# Altium PCB 分电板V2.PcbDoc (part 1 of 2)
Units mil, origin at the board's own origin, x right, y up, seen from the top; angles counter-clockwise.
Board outline 3149.61 x 2362.21 mil, 4 copper layers (Top Layer, GND, POWER, Bottom Layer), stack 23.756 mil thick; 196 components, 158 nets, 590 pads, 320 vias.
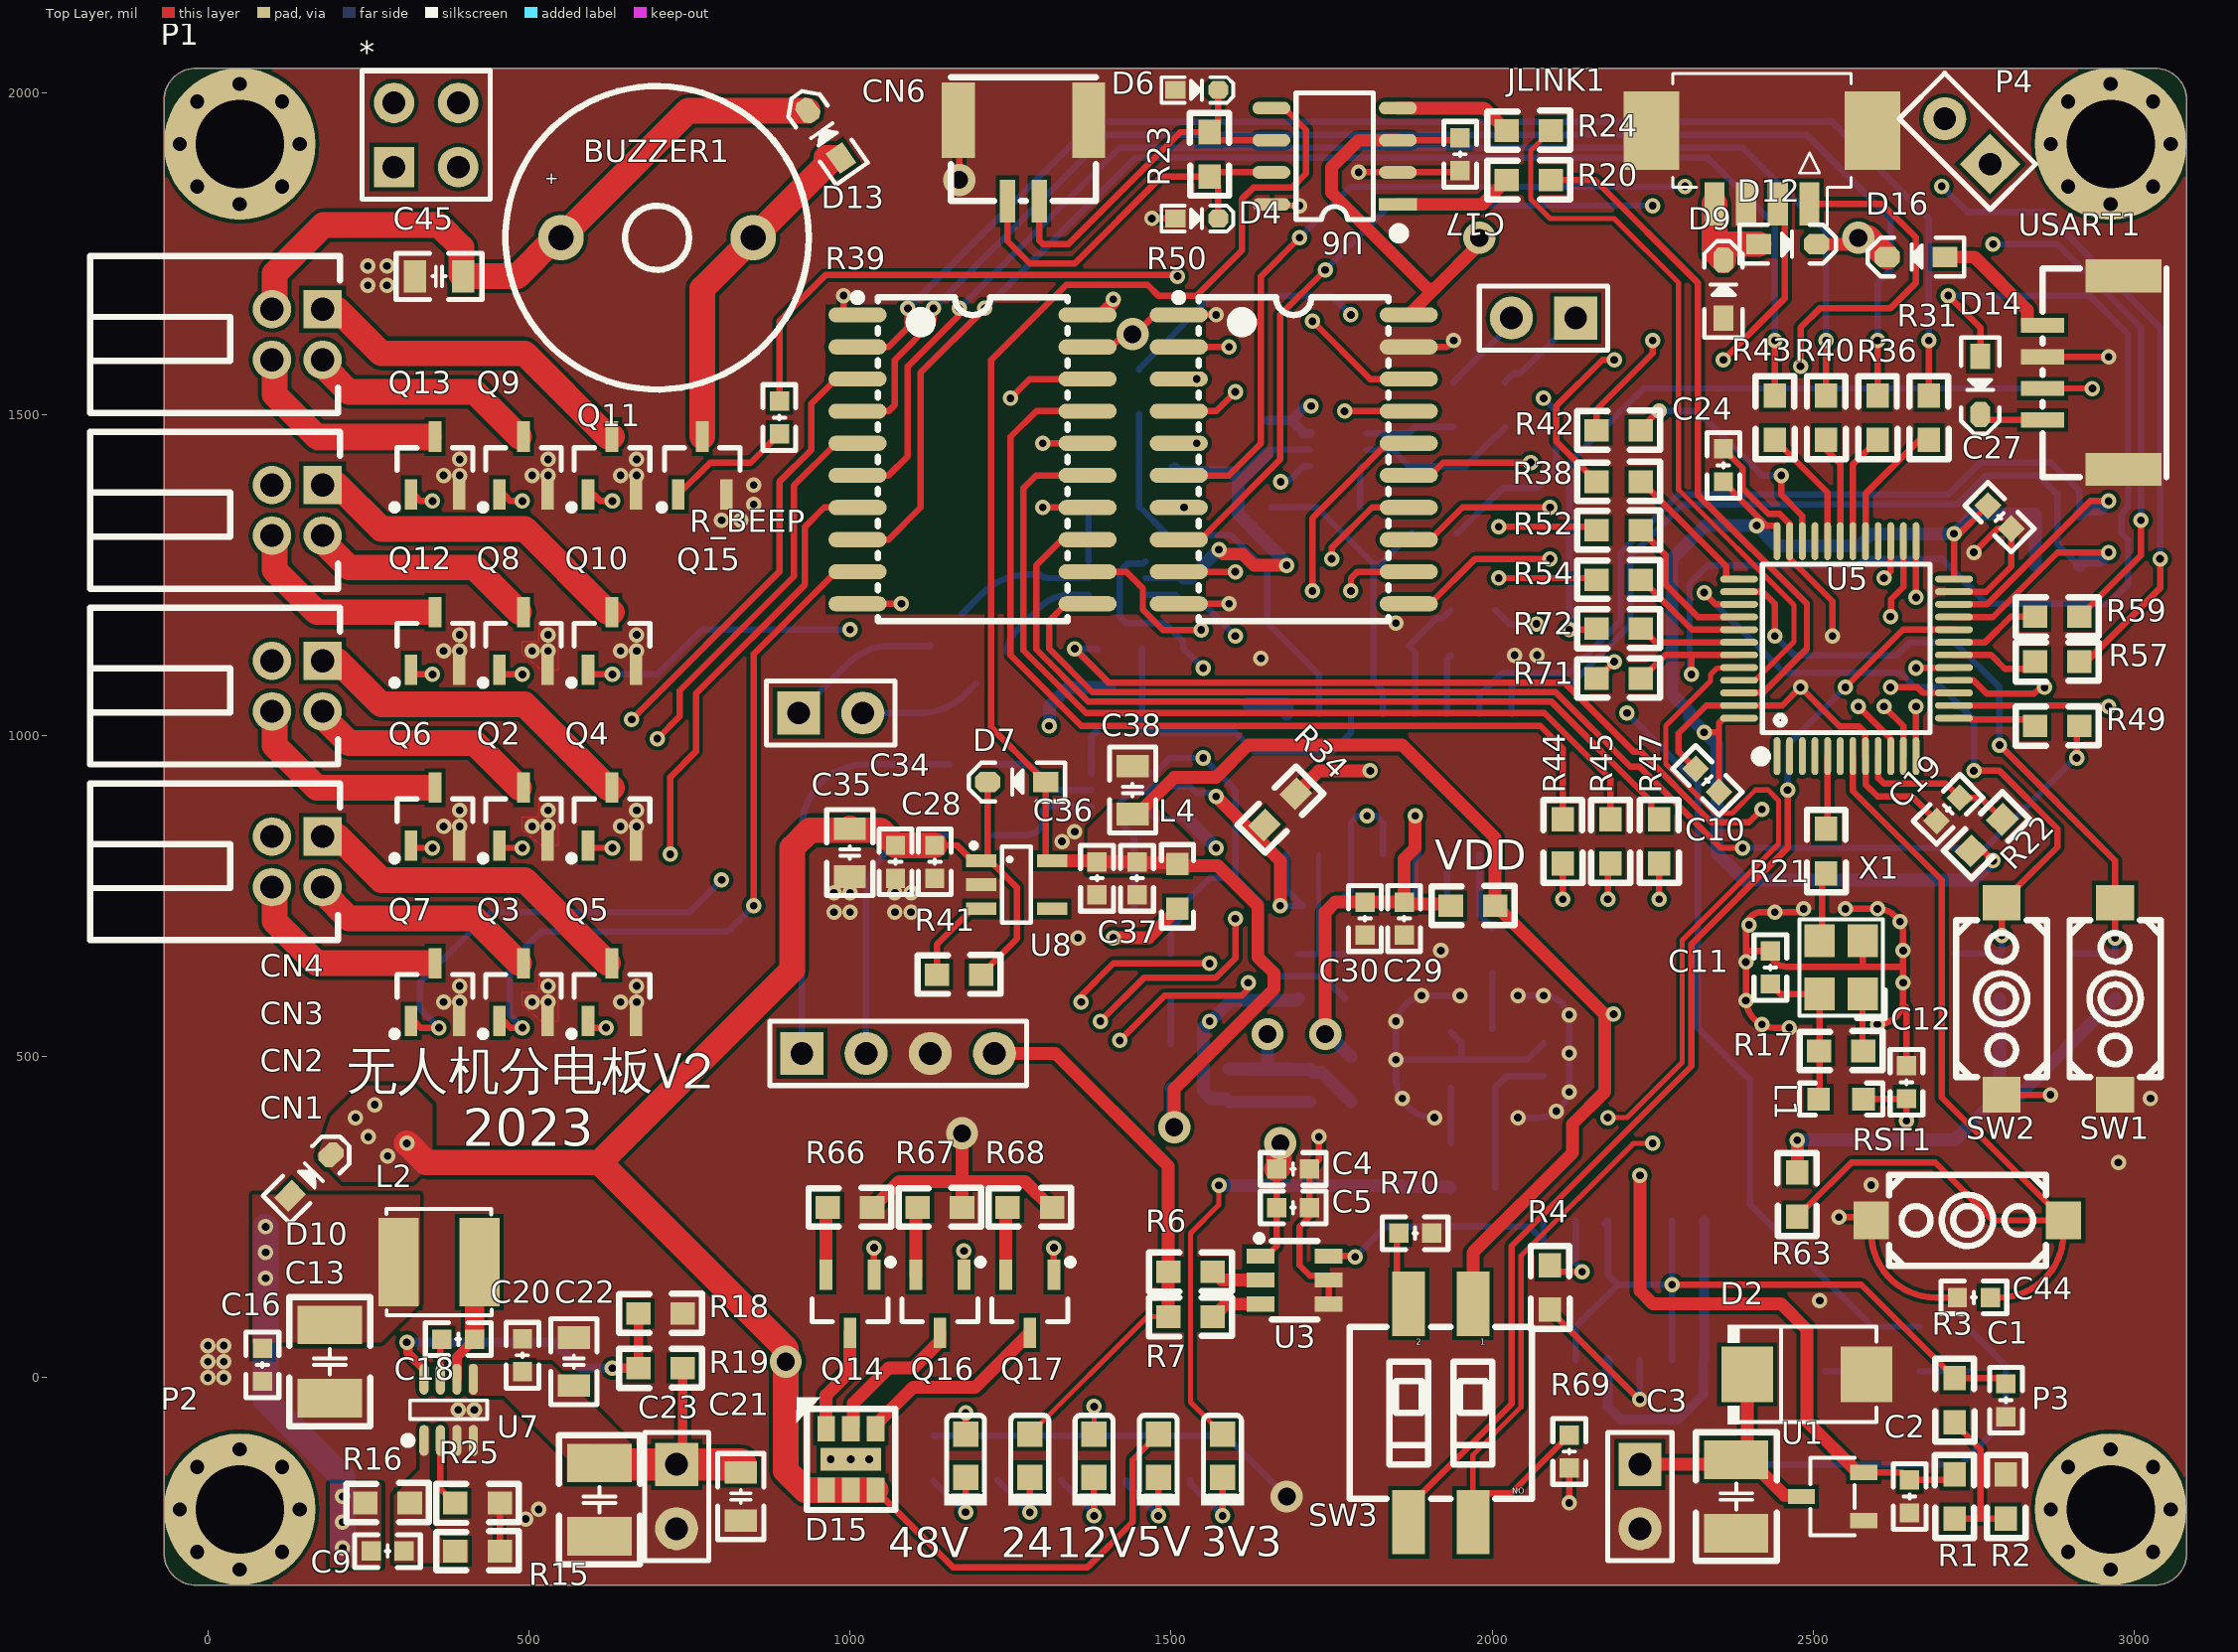
[diagram p0: Top Layer view]
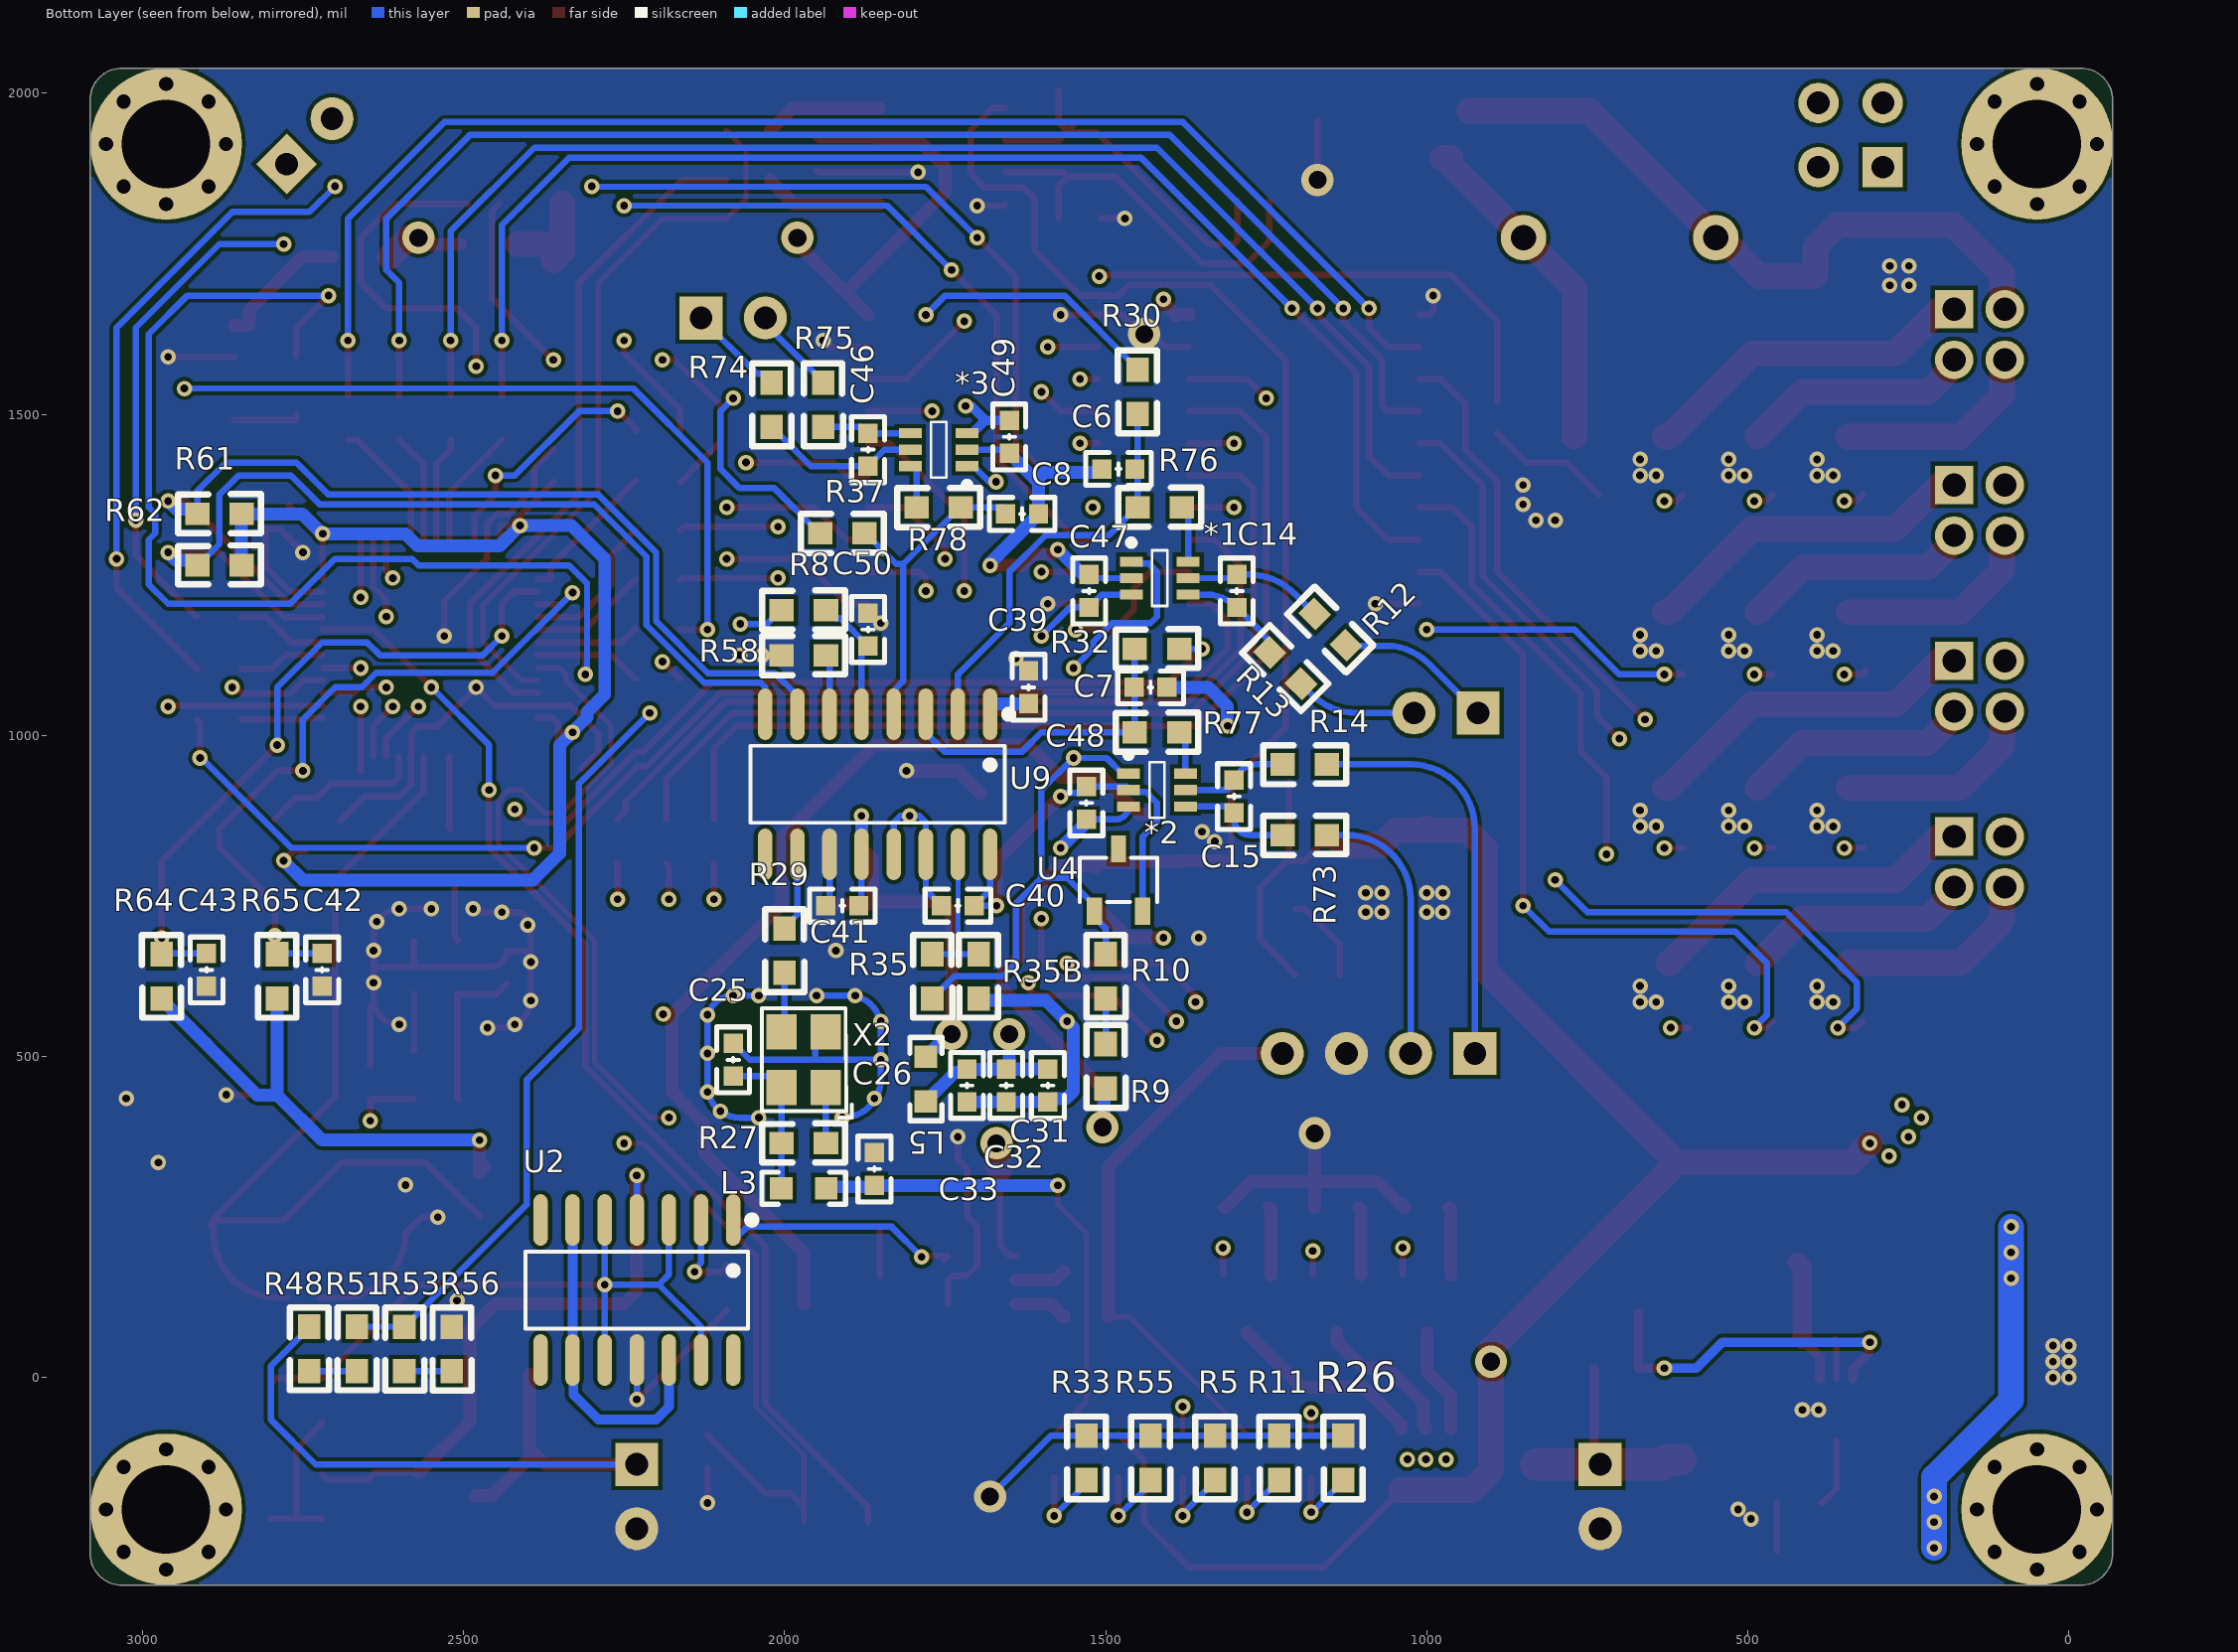
[diagram p1: Bottom Layer view, seen from below]
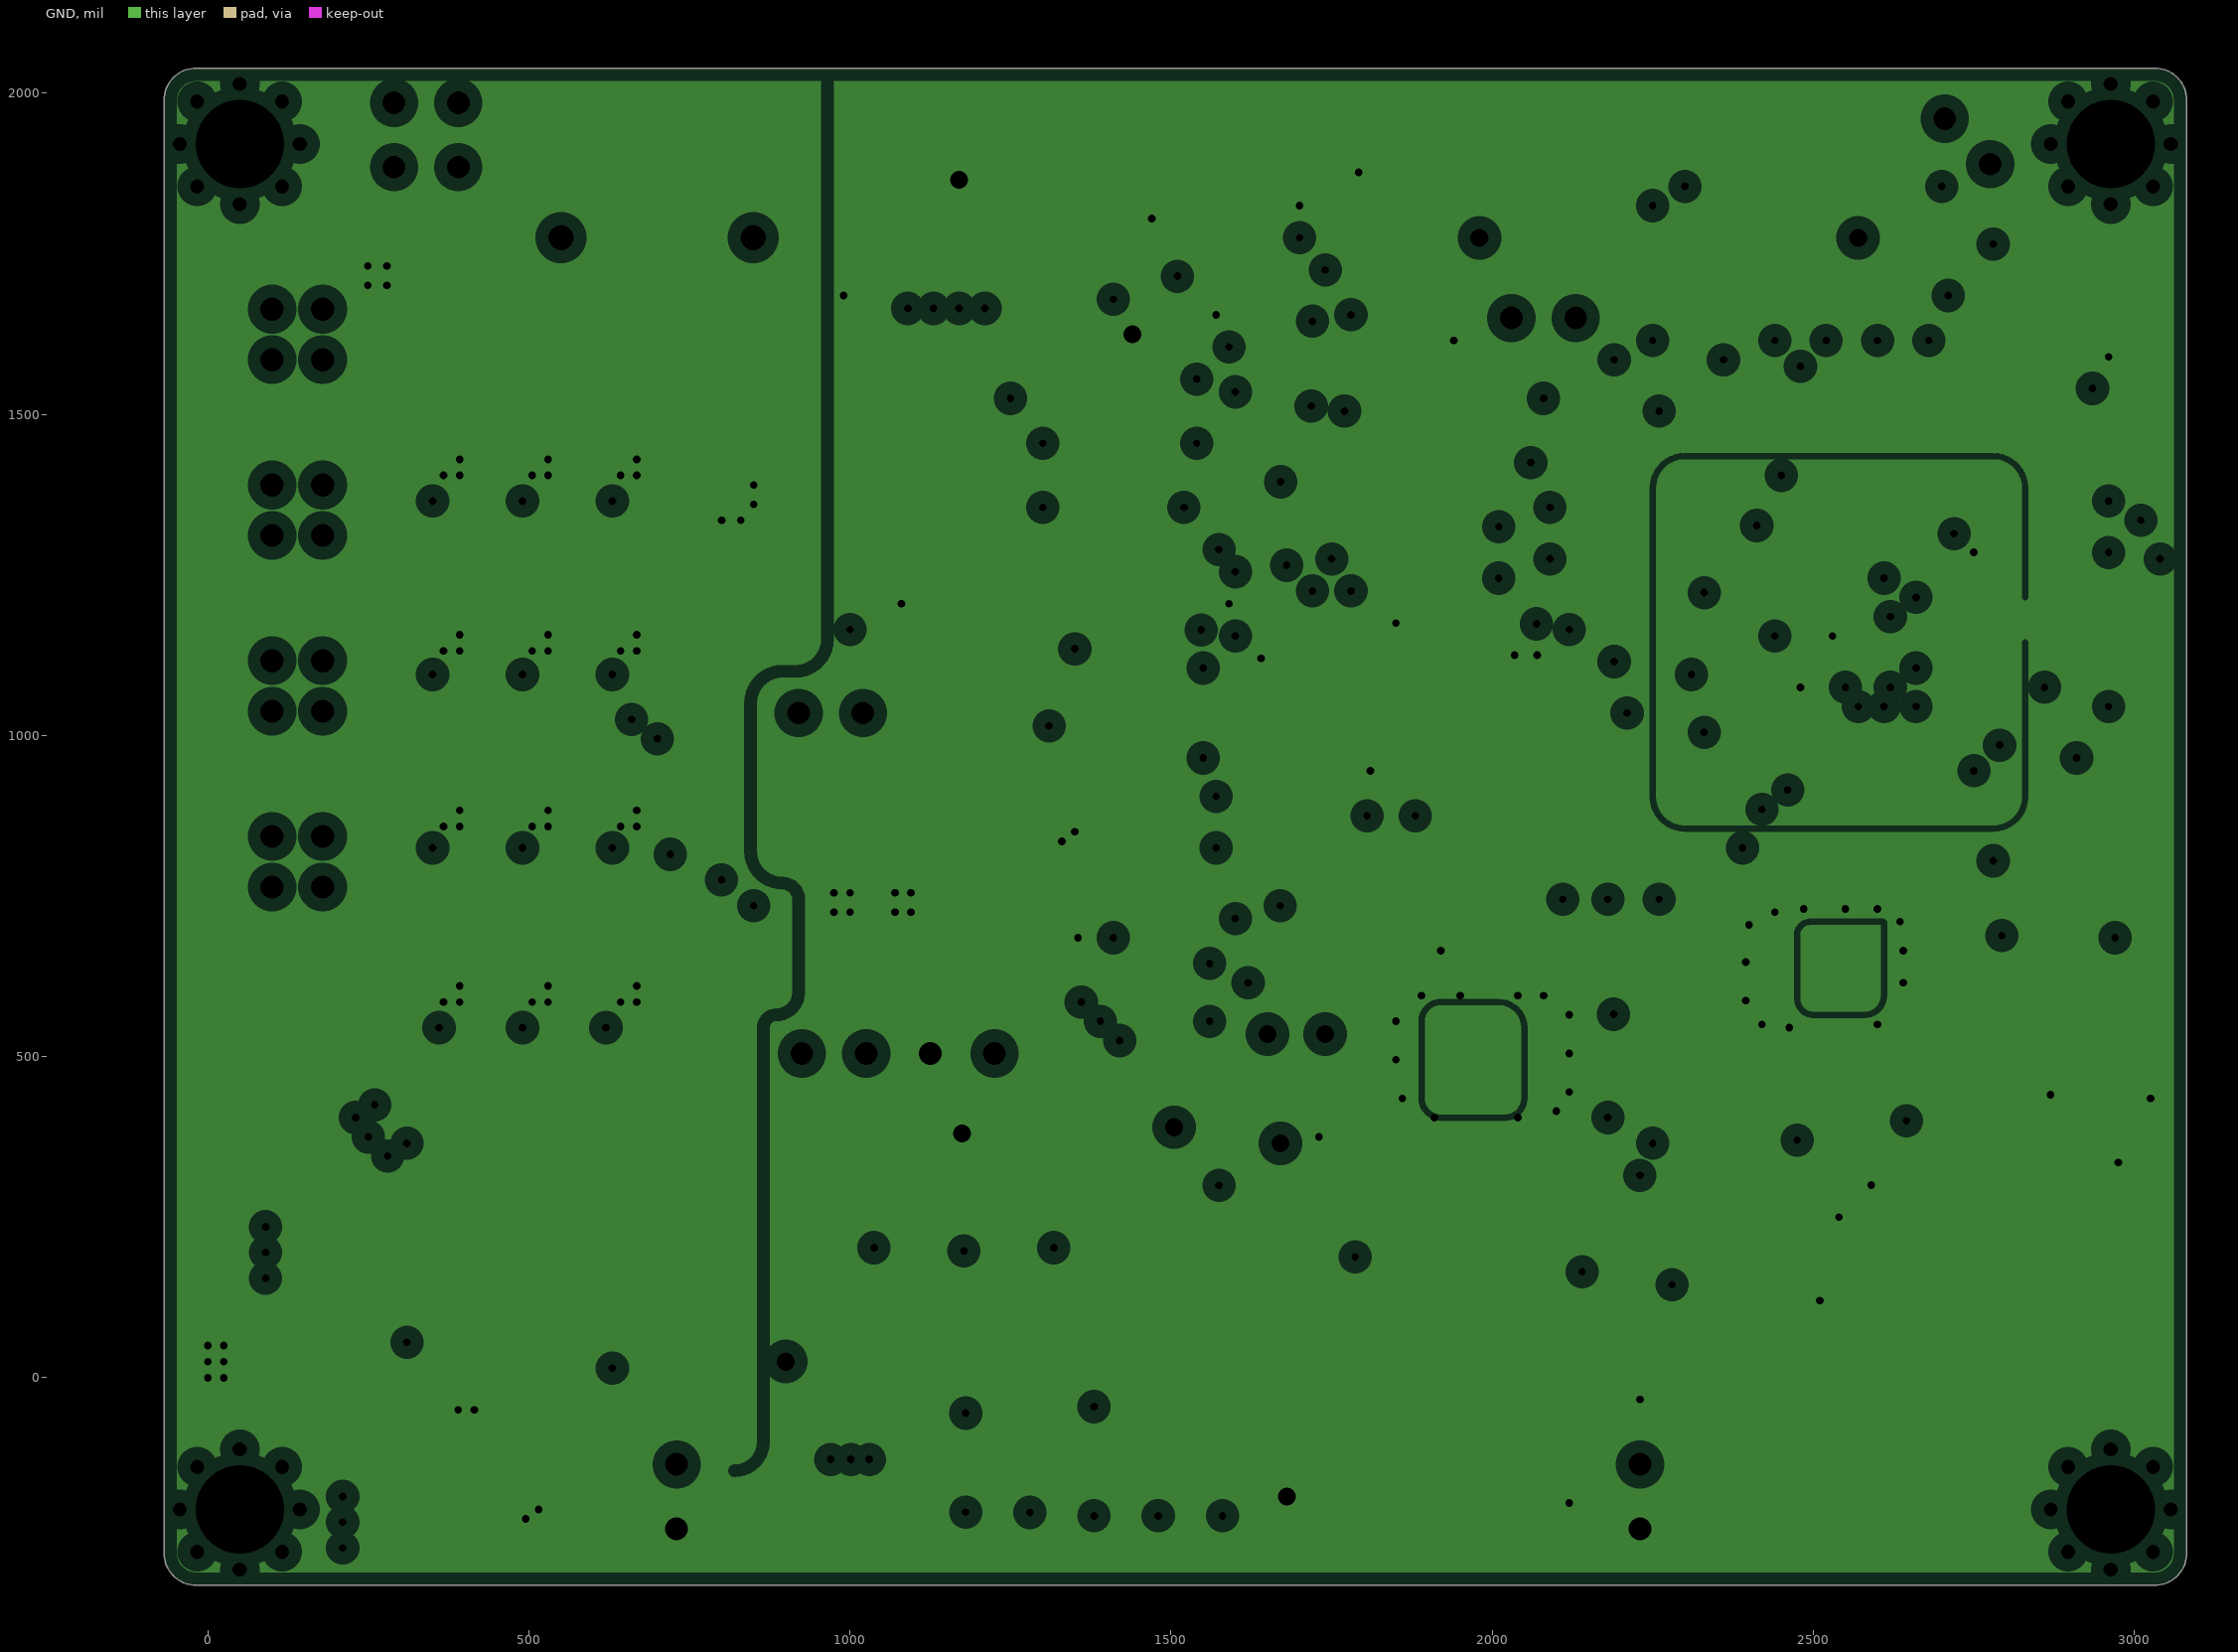
[diagram p2: GND, clearances drawn from the general rule]
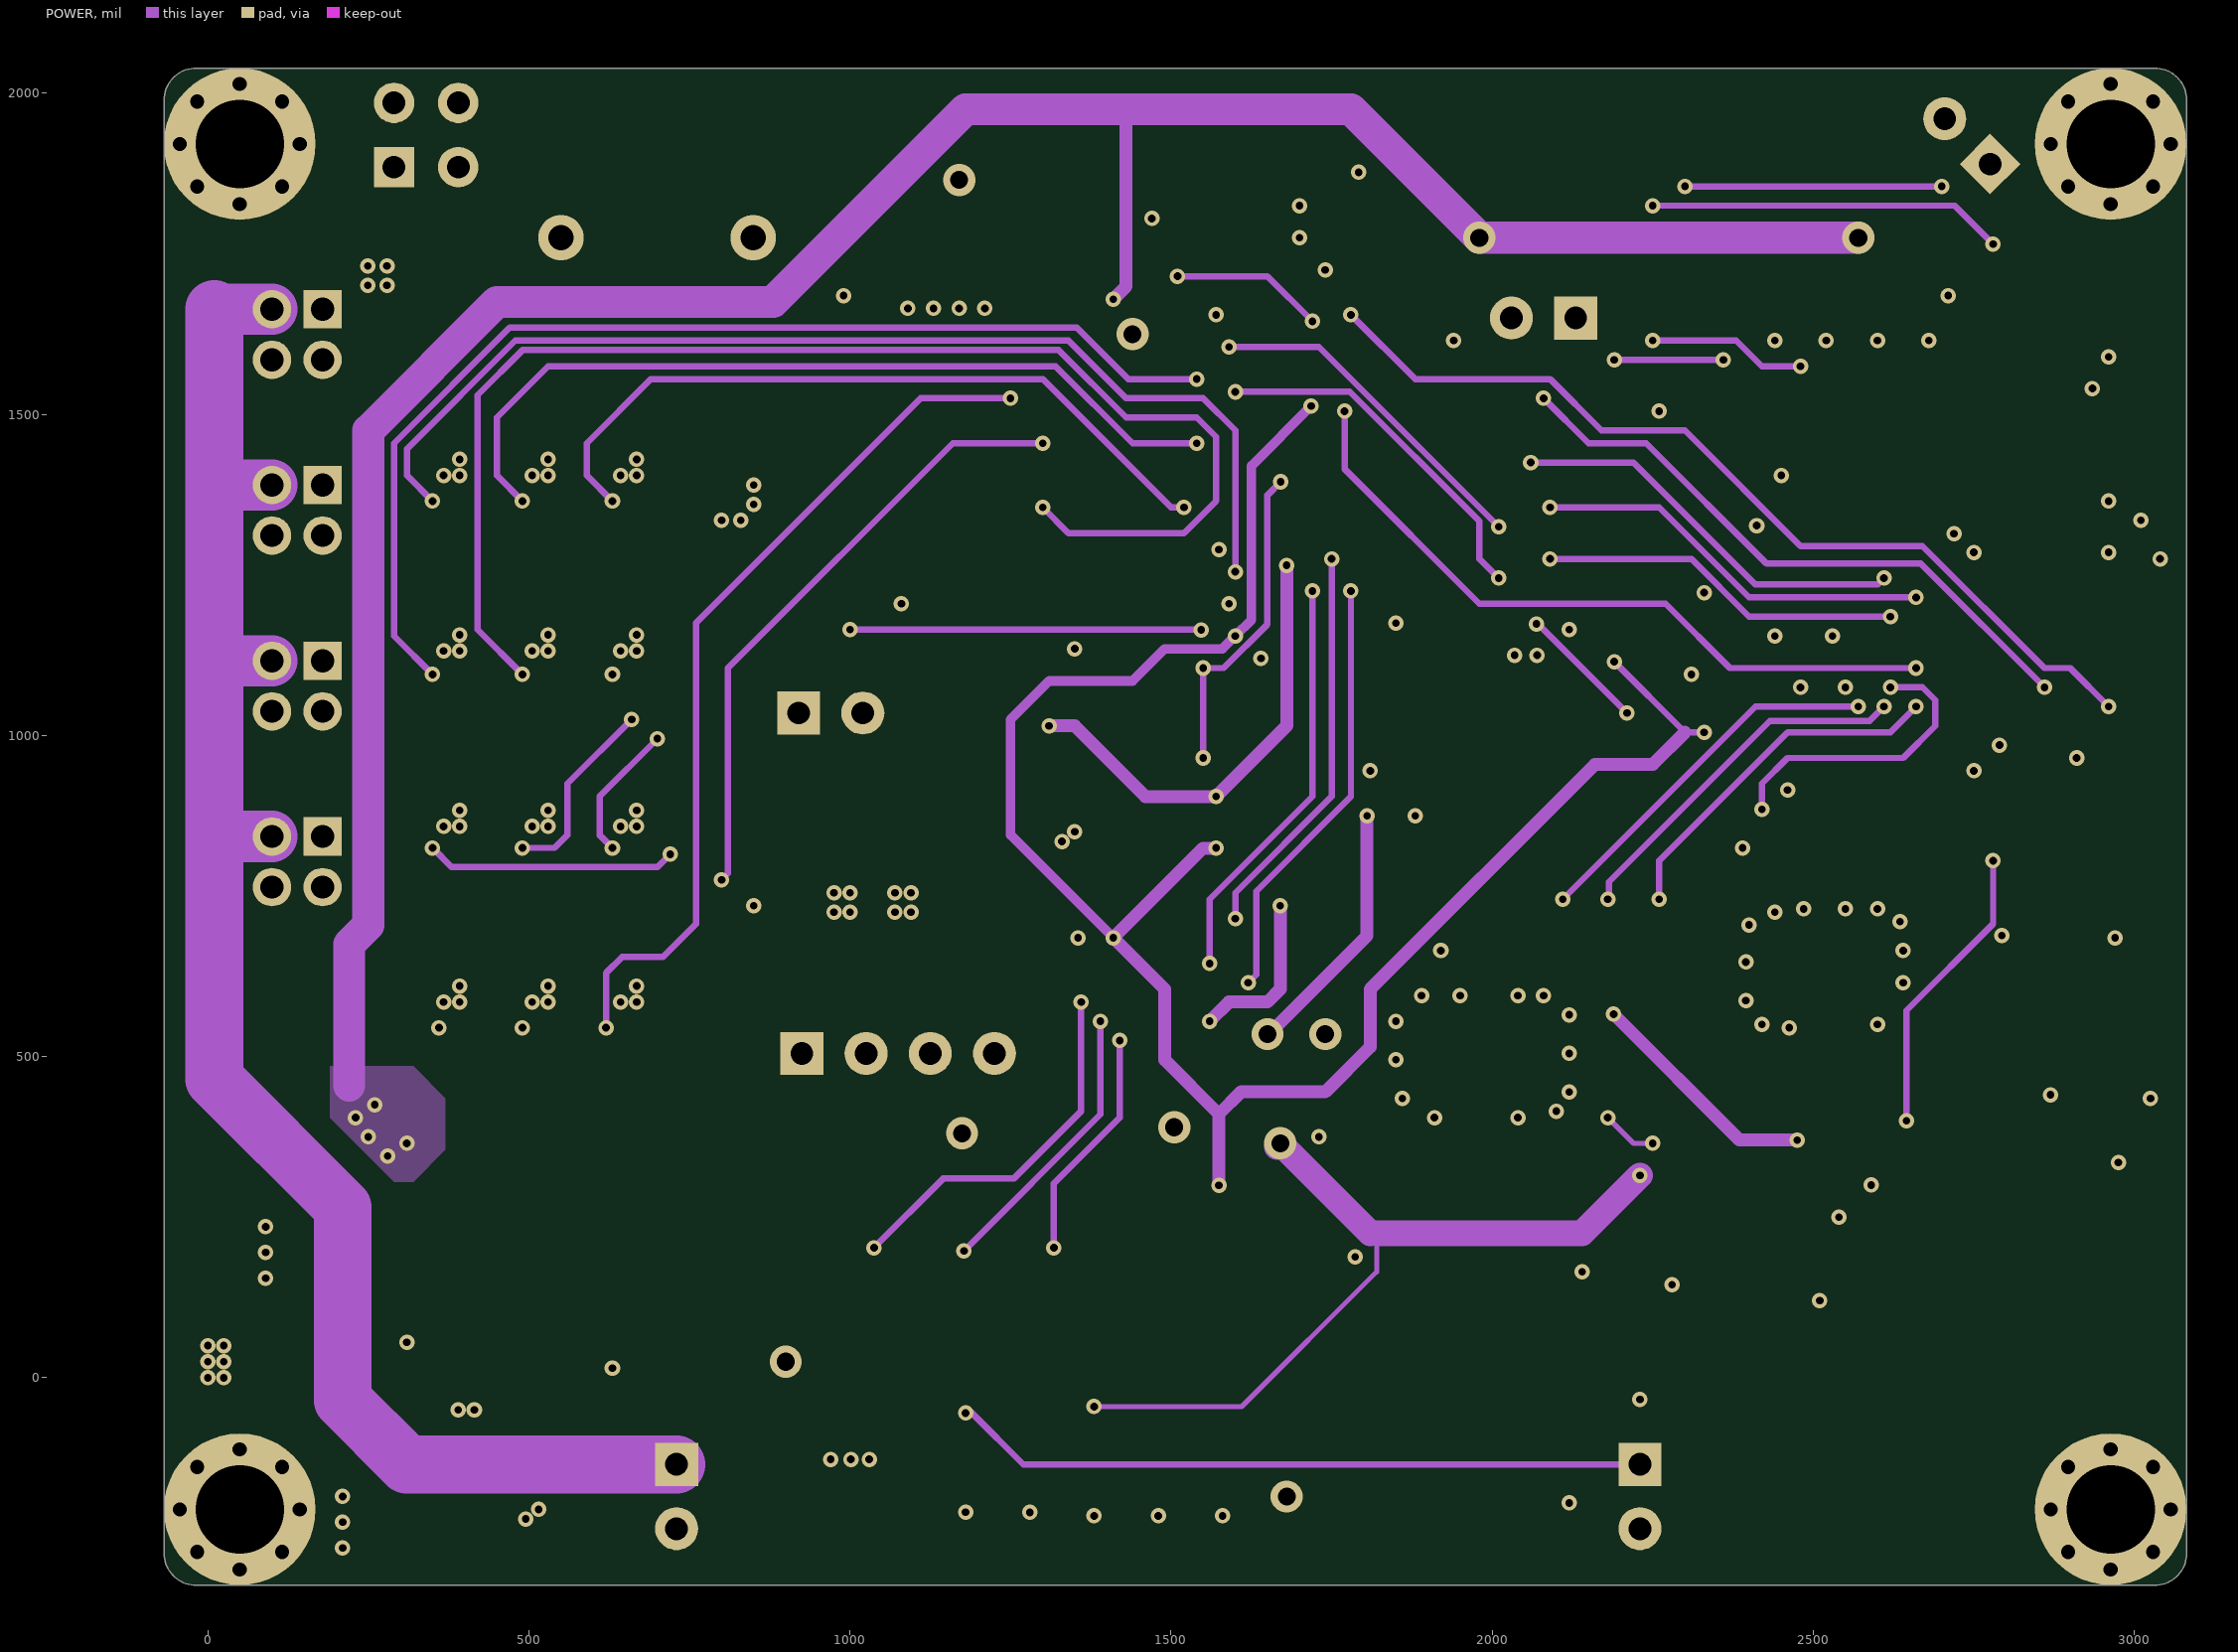
[diagram p3: POWER]

## Layer stack, top to bottom
Top Solder: solder mask 0.4, Solder Resist, Dk 3.5
Top Layer: signal copper 1.4
Dielectric 2: prepreg 2.8, PP-006, Dk 4.1
GND: plane copper 1.3778, net GND
Dielectric 1: dielectric 12.6, FR-4, Dk 4.8
POWER: signal copper 1.3778
Dielectric 3: prepreg 2.8, PP-006, Dk 4.1
Bottom Layer: signal copper 1.4
Bottom Solder: solder mask 0.4, Solder Resist, Dk 3.5

## Board outline
-68.11,-273.11 -68.11,1989.09 cw(c-18.11,1989.09) -18.11,2039.09 3031.5,2039.09 cw(c3031.5,1989.09) 3081.5,1989.09 3081.5,-273.11 cw(c3031.5,-273.11) 3031.5,-323.11 -18.11,-323.11 cw(c-18.11,-273.11)

## Design rules (kind name [scope] priority, off if disabled: settings)
Clearance [All] p1: gap=5.5 ignorepadtopadclearanceinfootprint=TRUE except(5: Arc-Arc Arc-Track Track-Track; 6: SMDPad-SMDPad SMDPad-THPad SMDPad-Via SMDPad-Fill SMDPad-Poly SMDPad-Region SMDPad-Text SMDPad-Hole THPad-THPad THPad-Via THPad-Fill THPad-Poly THPad-Region THPad-Text THPad-Hole Via-Via Via-Fill Via-Poly Via-Region Via-Text Via-Hole Fill-Hole Poly-Hole Region-Hole Text-Hole)
ComponentClearance [All] p1: gap=1 collisioncheckmode=3 verticalgap=1 showdistances=TRUE
DiffPairsRouting [All] p1: maxlimit=12 minlimit=8 mostfreqgap=10 toplayer_minwidth=8 toplayer_maxwidth=15 toplayer_prefwidth=10 midlayer1_minwidth=8 midlayer1_maxwidth=15 midlayer1_prefwidth=10 bottomlayer_minwidth=8 bottomlayer_maxwidth=15 bottomlayer_prefwidth=10 maxuncoupledlength=500
HoleSize [All] p1: absolutevalues=TRUE maxlimit=1574.8 minlimit=11.81 maxpercent=80.000 minpercent=20.000
HoleToHoleClearance [All] p1: gap=8 allowstackedmicrovias=TRUE
MinimumSolderMaskSliver [All] p1: minsoldermaskwidth=0
NetAntennae [All] p1: netantennaetolerance=1
PasteMaskExpansion [All] p1: expansion=5
PlaneClearance [All] p1: clearance=20
PlaneConnect [All] p1: pad.planeconnectstyle=Relief pad.reliefexpansion=20 pad.reliefentries=4 pad.reliefconductorwidth=25 pad.reliefairgap=10 via.planeconnectstyle=Direct via.reliefexpansion=20 via.reliefentries=4 via.reliefconductorwidth=10 via.reliefairgap=10
PolygonConnect [All] p1: connectstyle=Direct reliefconductorwidth=25 reliefentries=4 polygonreliefangle="90 Angle" airgapwidth=10
RoutingVias [All] p1: holewidth=20 width=35 viastyle="Through Hole" minholewidth=11.81 minwidth=23.62 maxholewidth=1574.8 maxwidth=1580.8
SilkToSilkClearance [All] p1: silktosilkclearance=0
SilkToSolderMaskClearance [IsPad] p1: minsilkscreentomaskgap=0 clearancetoexposedcopper=TRUE
SolderMaskExpansion [All] p1: expansion=5
Width [All] p1: maxlimit=125 minlimit=5 preferedwidth=20
19 further rules are at their usual default settings.

## Components (designator, comment, footprint, x,y, rotation, side; value= is the part's Value field where it differs from the comment)
3V3 "LED/绿" LED_0603 1580,-121.53 r90 top
5V "LED/蓝" LED_0603 1480,-121.53 r90 top
12V "LED" LED_0603 1380,-121.54 r90 top
24 "LED" LED_0603 1280,-121.53 r90 top (schematic designator 24_ON)
48V "LED/蓝" LED_0603 1180,-121.54 r90 top
* "上中板连接器" 上中板连接器 730,-235 r0 top locked
*1 "LT199" SC70-6L 1415.71,1245 r180 bottom
*2 "LT199" SC70-6L 1420,915 r180 bottom
*3 "LT199" SC70-6L 1760,1445 r0 bottom
BUZZER1 "TMB12A12" BUZ-TH_BD12.0-P7.60-D0.6-FD 699.6,1775 r0 top value=2400Hz
C1 "10nF" "C 0603_L" 2800,-35 r90 top
C2 "10uF" "C 0603_L" 2650,-185 r90 top
C3 "CAP" "C 1210_L" 2380,-185 r270 top
C4 "1uF" "C 0603_L" 1690,325 r180 top
C5 "100nF" "C 0603_L" 1690,265 r180 top
C6 "1uf" "C 0603_L" 1480,1415 r0 bottom
C7 "1uf" "C 0603_L" 1430,1075 r180 bottom
C8 "1uf" "C 0603_L" 1630,1345 r180 bottom
C9 "22pF/50V/0603" "C 0603_L" 280,-270 r0 top
C10 "100nf" "C 0603_L" 2335,930 r135 top
C11 "100nF" "C 0603_L" 2433.17,638.75 r270 top
C12 "1uF" "C 0603_L" 2645,460 r270 top
C13 "47uF/50V/1210" "C 1210_L" 190,25 r270 top
C14 "100nf" "C 0603_L" 1295.71,1225 r90 bottom
C15 "100nf" "C 0603_L" 1300,905 r90 bottom
C16 "100nF/50V/0603" "C 0603_L" 85,20 r270 top
C17 "100nF/50V/0603" "C 0603_L" 1950,1905 r90 top
C18 "10nF/50V/0603" "C 0603_L" 390,60 r180 top
C19 "100nf" "C 0603_L" 2710,885 r225 top
C20 "100nF/50V/0603" "C 0603_L" 490,35 r90 top
C21 "1uF/50V/0805" "C 0805_L" 830,-185 r270 top
C22 "4.7uF/50V/0805" "C 0805_L" 570,25 r90 top
C23 "47uF/50V/1210" "C 1210_L" 610,-190 r270 top
C24 "100nf" "C 0603_L" 2360,1420.59 r270 top
C25 "100nF" "C 0603_L" 2080,495 r270 bottom
C26 "1uF" "C 0603_L" 1860,325 r270 bottom
C27 "100nf" "C 0603_L" 2790,1340 r135 top
C28 "100nF/50V/0603" "C 0603_L" 1132.01,803.31 r270 top
C29 "100nF/50V/0603" "C 0603_L" 1862.95,715 r270 top
C30 "100nF/50V/0603" "C 0603_L" 1801.77,715 r270 top
C31 "1uF/50V/0603" "C 0603_L" 1590,455 r270 bottom
C32 "100nF/50V/0603" "C 0603_L" 1654.69,455 r270 bottom
C33 "10nF/50V/0603" "C 0603_L" 1715.87,455 r270 bottom
C34 "2.2uF/25V/0603" "C 0603_L" 1070.83,803.31 r270 top
C35 "4.7uF/25V/0805" "C 0805_L" 999.6,817.65 r270 top
C36 "100nF/12V/0402" "C 0603_L" 1384.6,777.65 r270 top
C37 "2.2uF/25V/0603" "C 0603_L" 1446.89,777.65 r270 top
C38 "4.7uF/25V/0805" "C 0805_L" 1440,915 r90 top
C39 "1uF" "C 0603_L" 1620,1075 r270 bottom
C40 "0.1uF" "C 0603_L" 1730,735 r0 bottom
C41 "0.1uF" "C 0603_L" 1910,735 r0 bottom
C42 "100nF" "C 0603_L" 2720,635 r270 bottom
C43 "100nF" "C 0603_L" 2900,635 r270 bottom
C44 "100nF" "C 0603_L" 2750,125 r180 top
C45 "10uf" "C 0805_L" 360,1715 r180 top
C46 "100nf" "C 0603_L" 1870,1445 r270 bottom
C47 "100nF" "C 0603_L" 1525.71,1225 r270 bottom
C48 "100nF" "C 0603_L" 1530,895 r270 bottom
C49 "100nF" "C 0603_L" 1650,1465 r90 bottom
C50 "1uf" "C 0603_L" 1870,1165 r90 bottom
CN1 "A2006WR-2x2P" CONN-TH_A2006WR-2X2P 139.37,803.31 r270 top
CN2 "A2006WR-2x2P" CONN-TH_A2006WR-2X2P 139.37,1076.99 r270 top
CN3 "A2006WR-2x2P" CONN-TH_A2006WR-2X2P 139.37,1350.68 r270 top
CN4 "A2006WR-2x2P" CONN-TH_A2006WR-2X2P 139.37,1624.37 r270 top
CN6 "GH1.25-2P" GH1.25-2P-LT 1270,1895 r180 top
D2 "SMBJ70A_C114008" SMB_L4.6-W3.6-LS5.3-RD 2490,5 r0 top
D4 "ESD5Z5VL" SOD-523 1540,1805 r0 top
D6 "ESD5Z5VL" SOD-523 1540,2005 r0 top
D7 "SD103AWS" SOD-323 1259.6,927.65 r180 top
D9 "BZX52B5V6" SOD-323 2360,1695 r90 top
D10 "SD103AWS" SOD-323 160,315 r45 top
D12 "SD103AWS" SOD-323 2460,1765 r0 top
D13 "SD103AWS" SOD-323 960,1936 r125 top
D14 "SD103AWS" SOD-323 2760,1545 r270 top
D15 "RGB3030" LED-SMD_L3.0-W3.0_C9900015600 987.28,-159.75 r180 top
D16 "SD103AWS" SOD-323 2660,1745 r180 top
JLINK1 "MX1.25_4p" MX1.25_4PIN 2420,1885 r0 top
L1 "磁珠470Ω/100MHz" "L 0603" 2543.17,433.75 r0 top
L2 "33uF/0.9A" IND-SMD_L4.0-W4.0 360,180 r180 top
L3 "磁珠470Ω/100MHz" "L 0603" 1970,295 r180 bottom
L4 "磁珠470Ω/100MHz" "L 0603" 1510,765 r90 top
L5 "磁珠470Ω/100MHz" "L 0603" 1780,465 r270 bottom
P1 "固定孔" 固定孔 49.69,1920.99 r0 top
P2 "固定孔" 固定孔 49.69,-204.99 r0 top
P3 "固定孔" 固定孔 2963.08,-204.99 r0 top
P4 "固定孔" 固定孔 2963.08,1920.99 r0 top
Q2 "5N10-MS" SOT23-3N 491.61,873.71 r0 top
Q3 "5N10-MS" SOT23-3N 491.61,600.38 r0 top
Q4 "5N10-MS" SOT23-3N 629.38,873.71 r0 top
Q5 "5N10-MS" SOT23-3N 629.38,600.38 r0 top
Q6 "5N10-MS" SOT23-3N 353.83,873.71 r0 top
Q7 "5N10-MS" SOT23-3N 353.83,600.38 r0 top
Q8 "5N10-MS" SOT23-3N 491.61,1147.04 r0 top
Q9 "5N10-MS" SOT23-3N 491.61,1420.38 r0 top
Q10 "5N10-MS" SOT23-3N 629.38,1147.04 r0 top
Q11 "5N10-MS" SOT23-3N 629.38,1420.38 r0 top
Q12 "5N10-MS" SOT23-3N 353.83,1147.04 r0 top
Q13 "5N10-MS" SOT23-3N 353.83,1420.38 r0 top
Q14 "5N10-MS" SOT23-3N 1000,115 r180 top
Q15 "5N10-MS" SOT23-3N 770,1420.38 r0 top
Q16 "5N10-MS" SOT23-3N 1140,115 r180 top
Q17 "5N10-MS" SOT23-3N 1280,115 r180 top
R1 "100K" "R 0603_L" 2720,-185 r270 top
R2 "10K" "R 0603_L" 2800,-185 r90 top
R3 "10K" "R 0603_L" 2720,-35 r90 top
R4 "10K" "R 0603_L" 2090,140.5 r90 top
R5 "47K" "R 0603_L" 1329.5,-125 r270 bottom
R6 "10" "R 0603_L" 1530,165 r0 top
R7 "10" "R 0603_L" 1530,95 r0 top
R8 "330" "R 0603_L" 1970,1195 r0 bottom
R9 "1k" "R 0603_L" 1500,485 r90 bottom
R10 "1k" "R 0603_L" 1500,625 r90 bottom
R11 "47K" "R 0603_L" 1229.75,-125 r270 bottom
R12 "100" "R 0603_L" 1150,1165 r225 bottom
R13 "100" "R 0603_L" 1220,1105 r225 bottom
R14 "100" "R 0603_L" 1190,955 r180 bottom
R15 "30k/0603" "R 0603_L" 420,-270 r180 top
R16 "220k/0603" "R 0603_L" 280,-195 r180 top
R17 "10k/0603" "R 0603_L" 2543.17,508.75 r180 top
R18 "30k/0603" "R 0603_L" 705,100 r180 top
R19 "100k/0603" "R 0603_L" 705,15 r0 top
R20 "330R/0603" "R 0603_L" 2057,1865 r180 top
R21 "10R" "R 0603_L" 2520,820 r90 top
R22 "0R" "R 0603_L" 2770,845 r45 top
R23 "120R/0603" "R 0603_L" 1560,1905 r270 top
R24 "330R/0603" "R 0603_L" 2057,1941.88 r180 top
R25 "47k/0603" "R 0603_L" 420,-195 r0 top
R26 "47K" "R 0603_L" 1130,-125 r270 bottom
R27 "10k/0603" "R 0603_L" 1970,365 r0 bottom
R29 "10R" "R 0603_L" 2000,665 r90 bottom
R30 "NAN" "R 0603_L" 1450,1535 r270 bottom
R31 "100R" "R 0603_L" 2680,1495 r90 top
R32 "NAN" "R 0603_L" 1420,1135 r0 bottom
R33 "2k/0603" "R 0603_L" 1530,-125 r90 bottom
R34 "0" "R 0603_L" 1670,885 r45 top
R35 "0" "R 0603_L" 1770,625 r90 bottom
R35B "NAN" "R 0603_L" 1697.75,625 r270 bottom
R36 "100R" "R 0603_L" 2600,1495 r90 top
R37 "NAN" "R 0603_L" 1910,1315 r180 bottom
R38 "100R/0603" "R 0603_L" 2197,1395 r180 top
R39 "AIP74HC244SA.TB" SOP-20_L12.7-W7.5-P1.27-LS10.2-BL 1190.87,1430.43 r270 top
R40 "100R" "R 0603_L" 2520,1495 r90 top
R41 "4.7k/0603" "R 0603_L" 1169.6,627.65 r180 top
R42 "100R/0603" "R 0603_L" 2197,1475 r180 top
R43 "100R" "R 0603_L" 2440,1495 r90 top
R44 "100R" "R 0603_L" 2110,835 r90 top
R45 "100R" "R 0603_L" 2184.07,835 r90 top
R47 "100R" "R 0603_L" 2260,835 r90 top
R48 "0" "R 0603_L" 2740,45 r90 bottom
R49 "100R" "R 0603_L" 2880,1015 r0 top
R50 "AIP74HC244SA.TB" SOP-20_L12.7-W7.5-P1.27-LS10.2-BL 1690.87,1430.43 r270 top
R51 "75K" "R 0603_L" 2666,45 r90 bottom
R52 "100R" "R 0603_L" 2197,1319.42 r180 top
R53 "4.7K" "R 0603_L" 2592,44.5 r90 bottom
R54 "100R" "R 0603_L" 2197,1242.54 r180 top
R55 "4.7k/0603" "R 0603_L" 1430.25,-125 r90 bottom
R56 "0" "R 0603_L" 2518,44.5 r90 bottom
R57 "100R" "R 0603_L" 2880,1115 r0 top
R58 "330R" "R 0603_L" 1970,1125 r180 bottom
R59 "100R" "R 0603_L" 2880,1185 r0 top
R61 "330R" "R 0603_L" 2880,1345 r0 bottom
R62 "330R" "R 0603_L" 2880,1265 r0 bottom
R63 "4.7k/0603" "R 0603_L" 2475,285 r270 top
R64 "10k" "R 0603_L" 2970,625 r270 bottom
R65 "10k" "R 0603_L" 2790,625 r270 bottom
R66 "3.3K" "R 0603_L" 1000,265 r180 top
R67 "3.3K" "R 0603_L" 1140,265 r180 top
R68 "3.3K" "R 0603_L" 1280,265 r180 top
R69 "10K" "C 0603_L" 2120,-115 r90 top
R70 "10K" "C 0603_L" 1880,225 r0 top
R71 "47k/0603" "R 0603_L" 2197,1088.77 r180 top
R72 "100/0603" "R 0603_L" 2197,1166.65 r0 top
R73 "100" "R 0603_L" 1190,845 r180 bottom
R74 "100" "R 0603_L" 2020,1515 r90 bottom
R75 "100" "R 0603_L" 1940,1515 r90 bottom
R76 "330" "R 0603_L" 1415.71,1355 r0 bottom
R77 "330" "R 0603_L" 1420,1005 r0 bottom
R78 "330" "R 0603_L" 1760,1355 r180 bottom
R_BEEP "10" "C 0603_L" 890,1495 r270 top
RST1 "K2-1107ST-A4DW-06_C118141" "KEY-SMD_L6.2-W3.6-LS8.0 - duplicate" 2740,245 r180 top
SW1 "K2-1107ST-A4DW-06_C118141" "KEY-SMD_L6.2-W3.6-LS8.0 - duplicate" 2970,590.16 r270 top
SW2 "K2-1107ST-A4DW-06_C118141" "KEY-SMD_L6.2-W3.6-LS8.0 - duplicate" 2793.37,590.16 r270 top
SW3 "DS-02BP" SW-SMD_EM-02KP 1920,-55 r180 top
U1 "ZXTR2112F-7" SOT-23-3_L2.9-W1.6-P1.90-LS2.8-BR 2530,-185 r0 top
U2 "LM324DR" "SOIC-14_L8.7-W3.9-P1.27-LS6.0-BL - duplicate" 2230,136.54 r0 bottom
U3 "SL27511" SOT-23-6_L2.9-W1.6-P0.95-LS2.8-BR 1692.19,152.02 r180 top
U4 "LM4041C12IDBZR" SOT-23-3_L2.9-W1.6-P1.90-LS2.8-BR 1480,775 r270 bottom
U5 "STM32F103C8T6" LQFP-48_L7.0-W7.0-P0.50-LS9.0-BL 2551.74,1135.23 r0 top
U6 "TJA1051T/3/1J" SOP8_L 1754.56,1901.93 r180 top
U7 "SY8303AIC" TSOT-23-8_L2.9-W1.6-P0.65-LS2.8-BR 375,-50 r270 top
U8 "LP5907QMFX-3.3Q1" SOT23-5N 1259.6,767.65 r270 top
U9 "BH45B1225" NSOP-16_L9.9-W3.9-P1.27-LS6.0-BL 1855,924.02 r0 bottom
USART1 "GH1.25" "GH1.25 4P-WT" 2920,1565 r90 top
VDD "0" "R 0603_L" 1970,735 r180 top
X1 "YSO680PR_12M_3.3V" "OSC 3225-4P" 2543.46,638.75 r90 top
X2 "OT32258MJBA4SL" OSC-SMD_4P-L3.2-W2.5-BL 1970,495 r90 bottom value=8MHz

## Footprints (in the part's own frame and the unit in brackets; to place one, negate y for a bottom-side part, rotate by r counter-clockwise, add the part's x,y. Pads: shape width x height; smd on the part's side, far side on the other; paste and mask are expansions set on the pad)
BUZ-TH_BD12.0-P7.60-D0.6-FD [mm]
  round 1.8 hole 1 paste+0 mask+0.051: 1(-3.8,0) 2(3.8,0)
  silkscreen extent -6,-6 6,6
"C 0603_L" [mil] "无极性贴片电容"
  rect 30x30 smd: 1(-25.59,0) 2(25.59,0)
  silkscreen extent -51,-26 51,26, body extent -31,-16 31,16, height 32
"C 0805_L" [mil] "无极性贴片电容"
  rect 35x50 smd: 1(-37.4,0) 2(37.4,0)
  silkscreen extent -67,-36 67,36, body extent -39,-24 39,24, height 20
"C 1210_L" [mil] "无极性贴片电容"
  rect 60x100 smd: 1(-57.09,0) 2(57.09,0)
  silkscreen extent -100,-63 100,63, body extent -63,-51 63,51, height 60
CONN-TH_A2006WR-2X2P [mil]
  rect 60x60 hole 36 paste+0 mask+2: 1(-39.37,39.37)
  round 60 hole 36 paste+0 mask+2: 2(-39.37,-39.37) 3(39.37,39.37) 4(39.37,-39.37)
  silkscreen extent -122,-323 122,66
"GH1.25 4P-WT" [mil]
  rect 23.6x67 smd: 1(73.8,62.99) 2(24.59,62.99) 3(-24.61,62.99) 4(-73.8,62.99)
  rect 51.18x118.11 smd: 5(150.59,-62.99) 6(-150.6,-62.99)
  silkscreen extent -162,-130 162,63, body extent -162,-110 162,81, height 172
GH1.25-2P-LT [mil]
  rect 23.6x67 smd: 1(24.6,62.99) 2(-24.6,62.99)
  rect 51.18x118.11 smd: 3(101.38,-62.99) 4(-101.38,-62.99)
  silkscreen extent -113,-130 113,63, body extent -110,-121 116,81, height 162
IND-SMD_L4.0-W4.0 [mm]
  rect 1.6x3.5 smd: 1(-1.6,0) 2(1.6,0)
  silkscreen extent -2.08,-2.1 2.08,2.1
"KEY-SMD_L6.2-W3.6-LS8.0 - duplicate" [mm]
  rect 1.4x1.5 smd paste+0 mask+0.051: 1(-3.8,0) 2(3.8,0)
  silkscreen extent -3.1,-1.8 3.1,1.8
"L 0603" [mil] "小功率贴片电感"
  rect 35x35 smd: 1(-35,0) 2(35,0)
  silkscreen extent -65,-25 65,25, body extent -31,-16 31,16, height 31
LED-SMD_L3.0-W3.0_C9900015600 [mm]
  rect 0.7x1 smd paste+0.102 mask+0.05: 1(-1.339,0.387) 2(-1.339,-2.043) 3(-0.359,0.387) 4(-0.359,-2.043) 5(0.621,0.387) 6(0.621,-2.043)
  rect 2.4x0.9 smd paste+0.102 mask+0.05: 7(-0.359,-0.828)
  silkscreen extent -2.11,-3.3 1.8,1.17
LED_0603 [mm]
  rect 1x1 smd paste+0 mask+0: 1(0.85,0) 2(-0.85,0)
  silkscreen extent -1.97,-0.85 1.6,0.85, body extent -0.92,-0.53 1.09,0.53, height 0.46
LQFP-48_L7.0-W7.0-P0.50-LS9.0-BL [mm]
  oval 0.27x1.5 smd paste+0 mask+0.05: 1(-2.75,-4.25) 2(-2.25,-4.25) 3(-1.75,-4.25) 4(-1.25,-4.25) 5(-0.75,-4.25) 6(-0.25,-4.25) 7(0.25,-4.25) 8(0.75,-4.25) 9(1.25,-4.25) 10(1.75,-4.25) 11(2.25,-4.25) 12(2.75,-4.25) 25(2.75,4.25) 26(2.25,4.25) 27(1.75,4.25) 28(1.25,4.25) 29(0.75,4.25) 30(0.25,4.25) 31(-0.25,4.25) 32(-0.75,4.25) 33(-1.25,4.25) 34(-1.75,4.25) 35(-2.25,4.25) 36(-2.75,4.25)
  oval 1.5x0.27 smd paste+0 mask+0.05: 13(4.25,-2.75) 14(4.25,-2.25) 15(4.25,-1.75) 16(4.25,-1.25) 17(4.25,-0.75) 18(4.25,-0.25) 19(4.25,0.25) 20(4.25,0.75) 21(4.25,1.25) 22(4.25,1.75) 23(4.25,2.25) 24(4.25,2.75) 37(-4.25,2.75) 38(-4.25,2.25) 39(-4.25,1.75) 40(-4.25,1.25) 41(-4.25,0.75) 42(-4.25,0.25) 43(-4.25,-0.25) 44(-4.25,-0.75) 45(-4.25,-1.25) 46(-4.25,-1.75) 47(-4.25,-2.25) 48(-4.25,-2.75)
  silkscreen extent -3.59,-4.46 3.3,3.34
MX1.25_4PIN [mm]
  rect 0.8x1.7 smd: 1(1.875,-1.45) 2(0.625,-1.45) 3(-0.625,-1.45) 4(-1.875,-1.45)
  rect 2.2x3.1 smd: 5(-4.375,1.45) 6(4.375,1.45)
  silkscreen extent -3.52,-2.3 3.53,3.7, body extent -5.21,-1.65 5.01,2.25, height 4.75
NSOP-16_L9.9-W3.9-P1.27-LS6.0-BL [mil]
  oval 22.6x80.24 smd paste+0 mask+2: 1(-175,-109.02) 2(-125,-109.02) 3(-75,-109.02) 4(-25,-109.02) 5(25,-109.02) 6(75,-109.02) 7(125,-109.02) 8(175,-109.02) 9(175,109.02) 10(125,109.02) 11(75,109.02) 12(25,109.02) 13(-25,109.02) 14(-75,109.02) 15(-125,109.02) 16(-175,109.02)
  silkscreen extent -210,-115 198,60
"OSC 3225-4P" [mm] "3.2*2.5*0.7mm(长宽高)"
  rect 1.3x1.2 smd: 1(-1.05,-0.85) 2(1.05,-0.85) 3(1.05,0.85) 4(-1.05,0.85)
  silkscreen extent -2.03,-1.75 1.91,1.65, body extent -1.6,-1.25 1.6,1.25, height 0.7
OSC-SMD_4P-L3.2-W2.5-BL [mm]
  rect 1.4x1.2 smd paste+0 mask+0.051: 1(-1.1,-0.875) 2(1.1,-0.875) 3(1.1,0.875) 4(-1.1,0.875)
  silkscreen extent -2.29,-1.9 2.03,1.65
"R 0603_L" [mil] "1/10W"
  rect 38x35 smd: 1(-34.5,0) 2(34.5,0)
  silkscreen extent -64,-31 65,30, body extent -34,-16 29,16, height 18
SC70-6L [mm] "6-Leads, Body 2.03x2.10mm, Pitch 0.65mm, IPC Medium Density"
  rect 0.9x0.4 smd: 1(-1.125,0.65) 2(-1.125,0) 3(-1.125,-0.65) 4(1.125,-0.65) 5(1.125,0) 6(1.125,0.65)
  silkscreen extent -1.25,-1.1 0.3,1.52, body extent -0.67,-1.1 0.67,1.1, height 1.1
SMB_L4.6-W3.6-LS5.3-RD [mil]
  rect 80.61x86.31 smd paste+0 mask+2: 1(-92.94,0) 2(92.94,0)
  silkscreen extent -123,-77 108,77
SOD-323 [mm] "1.8x1.3X0.9mm（长宽高，不包括引脚）"
  rect 1x0.8 smd: 1(-1.143,0)
  oct 1x0.8 smd: 2(1.143,0)
  silkscreen extent -1.91,-0.76 1.91,0.76, body extent -1.34,-0.63 1.31,0.67, height 1
SOD-523 [mm] "1.2x0.8X0.6mm（长宽高，不包括引脚）"
  rect 0.8x0.7 smd: 1(-0.85,0)
  oct 0.8x0.7 smd: 2(0.85,0)
  silkscreen extent -1.4,-0.51 1.45,0.51, body extent -0.8,-0.4 0.8,0.4, height 0.65
"SOIC-14_L8.7-W3.9-P1.27-LS6.0-BL - duplicate" [mil]
  oval 22.6x80.24 smd paste+0 mask+2: 1(-150,-109.02) 2(-100,-109.02) 3(-50,-109.02) 4(0,-109.02) 5(50,-109.02) 6(100,-109.02) 7(150,-109.02) 8(150,109.02) 9(100,109.02) 10(50,109.02) 11(0,109.02) 12(-50,109.02) 13(-100,109.02) 14(-150,109.02)
  silkscreen extent -185,-115 173,60
SOP8_L [mm] "5*6*1.8mm（长宽高）"
  rect 1.5x0.5 smd: 1(-2.5,1.905)
  oval 1.5x0.5 smd: 2(-2.5,0.635) 3(-2.5,-0.635) 4(-2.5,-1.905) 5(2.5,-1.905) 6(2.5,-0.635) 7(2.5,0.635) 8(2.5,1.905)
  silkscreen extent -2.69,-2.5 1.52,3.2, body extent -3,-2.5 3,2.5, height 1.9
SOP-20_L12.7-W7.5-P1.27-LS10.2-BL [mm]
  oval 0.6x2.3 smd: 1(-5.704,-4.55) 2(-4.434,-4.55) 3(-3.164,-4.55) 4(-1.894,-4.55) 5(-0.624,-4.55) 6(0.646,-4.55) 7(1.916,-4.55) 8(3.186,-4.55) 9(4.456,-4.55) 10(5.726,-4.55) 11(5.726,4.55) 12(4.456,4.55) 13(3.186,4.55) 14(1.916,4.55) 15(0.646,4.55) 16(-0.624,4.55) 17(-1.894,4.55) 18(-3.164,4.55) 19(-4.434,4.55) 20(-5.704,4.55)
  silkscreen extent -6.54,-4.7 6.41,3.75
SOT23-3N [mm] "3x1.3x1mm(长宽高)"
  rect 0.5x1.2 smd: 1(-0.95,-1.143) 2(0.95,-1.143) 3(0,1.143)
  silkscreen extent -1.72,-1.78 1.5,0.7, body extent -1.5,-1.2 1.5,1.2, height 1.05
SOT23-5N [mm] "3x1.6x1.1mm(长宽高)"
  rect 0.5x1.2 smd: 1(-0.95,-1.4) 2(0,-1.4) 3(0.95,-1.4) 4(0.95,1.4) 5(-0.95,1.4)
  silkscreen extent -1.63,-1.78 1.5,0.56, body extent -1.5,-1.4 1.5,1.4, height 1.15
SOT-23-3_L2.9-W1.6-P1.90-LS2.8-BR [mm]
  rect 1.07x0.6 smd: 1(1.235,-0.95) 2(1.235,0.95) 3(-1.235,0)
  silkscreen extent -0.88,-1.54 0.88,1.54, body extent -1.2,-1.5 1.2,1.5, height 1.05
SOT-23-6_L2.9-W1.6-P0.95-LS2.8-BR [mm]
  rect 1.1x0.6 smd paste+0 mask+0.051: 1(1.35,-0.95) 2(1.35,0) 3(1.35,0.95) 4(-1.35,0.95) 5(-1.35,0) 6(-1.35,-0.95)
  silkscreen extent -0.9,-1.78 1.52,1.55
SW-SMD_EM-02KP [mil]
  rect 51.18x100 smd paste+0 mask+2: 1(-50,-170) 2(50,-170) 3(50,170) 4(-50,170)
  silkscreen extent -142,-134 142,134
TSOT-23-8_L2.9-W1.6-P0.65-LS2.8-BR [mil]
  oval 48.1x14.3 smd mask+2: 1(47.7,-38.4) 2(47.7,-12.8) 3(47.7,12.8) 4(47.7,38.4) 5(-47.7,38.4) 6(-47.7,12.8) 7(-47.7,-12.8) 8(-47.7,-38.4)
  silkscreen extent -15,-69 54,60, body extent -55,-57 55,57, height 39
上中板连接器 [mm]
  rect 1.7x1.7 hole 0.9: 1(38.1,2.54) 3(0,2.54) 5(4.826,32.258) 7(4.953,18.796) 9(35.56,47.879)
  round 1.7 hole 0.9: 2(38.1,0) 4(0,0) 6(7.366,32.258) 8(7.493,18.796) 10(12.573,18.796) 11(33.02,47.879) 12(50.156,55.762) 13(10.033,18.796)
  rect 1.6x1.6 hole 0.9: 12(-11.176,53.848)
  round 1.6 hole 0.9: 12(-11.176,56.388) 12(-8.636,53.848) 12(-8.636,56.388)
  rect 1.7x1.7 hole 0.9 rot 135: 12(51.952,53.966)
  silkscreen extent -12.45,-1.27 53.75,57.66, body extent -12.45,-1.27 53.75,57.66, height 8.5
固定孔 [mm]
  round 6 hole 3.5: 1(0,0)

## Part data
3V3 5V 48V: library part LED, "发光二极管"
12V 24: "发光二极管"
*1 *2 *3: "双向、零漂移电流感应放大器"
BUZZER1: Current Consumption=30mA, JLCPCB Part Class="Extended Part", LCSC Part Name=有源电, Manufacturer=YUEXIN(ÔÃÜ, Operating Temperature=-30℃~+85?, Operating Voltage=8V~15V, Rated Voltage=12V, Add into BOM=yes, Convert to PCB=yes, Datasheet=https://atta.szlcsc.com/upload/public/pdf/source/20200927/C781859_CEC7B7F6A9D62F380D126441DF0F265C.pdf, Device=TMB12A12, Diameter (φD)=12mm, Height=9.5mm, Length=-, Manufacturer Part=TMB12A12, Name=2400Hz, Oscillator Circuit=有源(内, Sound Pressure Level (SPL)=88dB@10cm, Supplier=LCSC, Supplier Footprint=插件,D=12, Supplier Part=C781861, Symbol=TMB12A12_C781861, Technology Type=µç´, Width=-
C1 C2 C4 C5 C6 C7 C8 C9 C10 C13 C14 C15 C16 C17 C18 C19 C20 C21 C22 C23 C24 C27 C29 C30 C31 C32 C33 C35 C36 C38 C45 C46 C47 C48 C49 C50: library part CAP, "陶瓷电容"
C3: "陶瓷电容"
C11 C12 C25 C26 C28 C34 C37 C39 C40 C41 C42 C43 C44: library part CAP, "Capacitor"
CN1 CN2 CN3 CN4: JLCPCB Part Class="Extended Part", LCSC Part Name="PH 2mm 2x2P 镀?", Manufacturer=CJT(³¤½­Á, Add into BOM=yes, Contact Material=黄?, Convert to PCB=yes, Datasheet=https://atta.szlcsc.com/upload/public/pdf/source/20180913/C273077_48101FEEEEEA06DA8F558152F6E7ED54.pdf, Device=A2006WR-2x2P, Manufacturer Part=A2006WR-2x2P, Mounting Style=-, Name=A2006WR-2x2P, Number of PINs Per Row=2, Number of Rows=2, Pins Structure=2x2P, Pitch=2mm, Reference Series=PH, Row Spacing=2mm, Supplier=LCSC, Supplier Footprint=弯插,P=2, Supplier Part=C273077, Symbol=A2006WR-2X2P_C273077
CN6: "连接端子", BOM_Manufacturer="Changjiang Connectors", BOM_Manufacturer Part=A1257WR-S-2P, BOM_Supplier=LCSC, BOM_Supplier Part=C225125, Contributor=LCSC, spicePre=C, spiceSymbolName=A1257WR-S-2P
D2: Breakdown Voltage=77.8V, JLCPCB Part Class="Extended Part", LCSC Part Name="单向TVS 70V截止 5.", Manufacturer=MDD, Manufacturer Part=SMBJ70A, Maximum Clamping Voltage=113V, Peak Pulse Current (Ipp)@10/1000μs=5.3A, Reverse Stand-Off Voltage (Vrwm)=70V, Add into BOM=yes, Convert to PCB=yes, Datasheet=https://atta.szlcsc.com/upload/public/pdf/source/20230314/C8F66EF07395B88C11214ABD10019202.pdf, Device=SMBJ70A_C114008, Name=SMBJ70A, Polarity=单?, Supplier=LCSC, Supplier Footprint=SMB(DO-214AA), Supplier Part=C114008, Symbol=SMBJ70A
D4 D6: "ESD 单向 5V", BOM_JLCPCB Part Class="Extended Part", BOM_Manufacturer=MDD, BOM_Manufacturer Part=SMF6.5A, BOM_Supplier=LCSC, BOM_Supplier Part=C123792, Contributor=LCSC, spicePre=D, spiceSymbolName=SMF6.5A
D7 D10 D12 D13 D14 D16: "二极管"
D9: "稳压二极管"
JLINK1: "连接端子", BOM_Manufacturer="Changjiang Connectors", BOM_Manufacturer Part=A1257WR-S-4P, BOM_Supplier=LCSC, BOM_Supplier Part=C225127, Contributor=LCSC, spicePre=C, spiceSymbolName=A1257WR-S-4P
L1 L3 L4 L5: library part 磁珠470Ω, BOM_Manufacturer=Sunlord, BOM_Manufacturer Part=UPZ1608U471-1R5TF, BOM_Supplier=LCSC, BOM_Supplier Part=C74335, nameAlias=Value, spicePre=L, spiceSymbolName=UPZ1608U471-1R5TF
L2: library part L-SMDP, "贴片功率电感", BOM名称=¹
Q2 Q3 Q4 Q5 Q6 Q7 Q8 Q9 Q10 Q11 Q12 Q13 Q14 Q15 Q16 Q17: library part YJL3400A, BOM_JLCPCB Part Class="Extended Part", BOM_Manufacturer="Yangzhou Yangjie Elec Tech", BOM_Manufacturer Part=YJL3400A, BOM_Supplier=LCSC, BOM_Supplier Part=C699302, Contributor=LCSC, spicePre=Q, spiceSymbolName=YJL3400A
R1 R2 R3 R4 R5 R6 R7 R8 R9 R10 R11 R12 R13 R14 R15 R16 R17 R18 R19 R20 R21 R22 R23 R24 R25 R26 R27 R29 R30 R31 R32 R33 R34 R35 R35B R36 R37 R38 R40 R41 R42 R43 R44 R45 R47 R48 R49 R51 R52 R53 R54 R55 R56 R57 R58 R59 R61 R62 R63 R64 R65 R66 R67 R68 R71 R72 R73 R74 R75 R76 R77 R78 VDD: library part RES, "贴片电阻"
R69 R70: BOM_LCSC Assembly=Yes, BOM_Manufacturer=UniOhm, BOM_Manufacturer Part=0805W8F0000T5E, BOM_Supplier=LCSC, BOM_Supplier Part=C17477, nameAlias="Resistance (Ohms)", SMT Type=Basic, spicePre=R, spiceSymbolName=0805W8F0000T5E
R_BEEP: library part RES
RST1 SW1 SW2: Contact Current=50mA, Insulation Resistance=100MΩ, JLCPCB Part Class="Extended Part", LCSC Part Name="轻触开关 3.6*6", Manufacturer=韩国, Manufacturer Part=K2-1107ST-A4DW-06, Operating Force=250gf@±30gf, Operating Temperature=-25℃~+85?, Voltage Rating (DC)=12V, Actuator Style=矩形, Add into BOM=yes, Circuit=单刀, Convert to PCB=yes, Datasheet=https://atta.szlcsc.com/upload/public/pdf/source/20210810/381712CEF248770C072B585C3485C888.pdf, Device=K2-1107ST-A4DW-06_C118141, Mechanical Life=100000, Mounting Style=立?, Name=K2-1107ST-A4DW-06, Supplier=LCSC, Supplier Footprint=SMD, Supplier Part=C118141, Switch Height=2.5mm, Switch Length=6.1mm, Switch Width=3.6mm, Symbol=K2-1107ST-A4SW-06, With Lamp=-
SW3: BOM_Manufacturer=HRO, BOM_Manufacturer Part=DS-02BP, BOM_Supplier=LCSC, BOM_Supplier Part=C129068, Contributor=LCSC, spicePre=S, spiceSymbolName=DS-02BP
U1: Dropout Voltage=-, JLCPCB Part Class="Extended Part", LCSC Part Name="正 Vin=60V Vout=12V 50mA 50dB@(100Hz)", Manufacturer=DIODES(ÃÀÌ, Maximum Input Voltage=60V, Output Current=50mA, Output Voltage=12V, Power Supply Rejection Ratio (PSRR)=50dB@(100Hz), Add into BOM=yes, Convert to PCB=yes, Datasheet=https://atta.szlcsc.com/upload/public/pdf/source/20191028/C441831_30B6D71C82CD52B81E1403E5F67B24E2.pdf, Device=ZXTR2112F-7, Manufacturer Part=ZXTR2112F-7, Name=ZXTR2112F-7, Number of Outputs=1, Output Polarity=正, Output Type=固?, Supplier=LCSC, Supplier Footprint=SOT-23, Supplier Part=C441831, Symbol=ZXTR2112F-7
U2: JLCPCB Part Class="Extended Part", Manufacturer=TI(德州, Operating Temperature="0¡ãC ~ 70¡", Supply Voltage（Single）="3V ~ 32V, ±1.5V ~", Add into BOM=yes, Amplifier Type="General Purpose", Convert to PCB=yes, Datasheet=https://atta.szlcsc.com/upload/public/pdf/source/20140704/1457707114488.pdf, Device=LM324DR, Gain Bandwidth Product（GBP）=1.2M, Iq per channel (Typ)=1.4mA, LCSC Part Name=LM324DR, Manufacturer Part=LM324DR, Name=LM324DR, Number of Circuits=4, Output Type=-, Slew Rate（SR）="0.5 V/", Supplier=LCSC, Supplier Footprint=SOIC-14, Supplier Part=C7943, Symbol=LM324DR
U3: JLCPCB Part Class="Extended Part", LCSC Part Name="低边 IGBT MOSFET 灌:8A", Manufacturer=Slkor(萨科, Operating Temperature=-40℃~+125℃@(T, Peak Output Current(sink)=8A, Peak Output Current(source)=4A, Supply Voltage=4.5V~20V, Add into BOM=yes, Convert to PCB=yes, Datasheet=https://atta.szlcsc.com/upload/public/pdf/source/20210108/C2681373_CD41C44CDBB9248B0528B6216F344054.pdf, Device=SL27511, Driven Configuration=低?, Fall Time=4.5ns, Feature=Ç·Ñ¹±£», loadtype=MOSFET；IGBT, Manufacturer Part=SL27511, Name=SL27511, Number of Drivers=1, Propagation Delay tpHL=16ns, Propagation Delay tpLH=16ns, Rise Time=6ns, Supplier=LCSC, Supplier Footprint=SOT-23-6, Supplier Part=C2681373, Symbol=SL27511, Whether the isolation=·Ç¸
U4: "1.225V", Input Voltage=-, JLCPCB Part Class="Extended Part", LCSC Part Name="并联 1.225V 12", Manufacturer=TI(德州, Minimum Cathode Current for Regulation=80uA, Operating Temperature=-40℃~+85℃@(T, Output Current=12mA, Temperature Coefficient=100ppm/℃, Tolerance=±0.5%, Add into BOM=yes, Convert to PCB=yes, Datasheet=https://atta.szlcsc.com/upload/public/pdf/source/20170930/C133587_1506736441908997434.pdf, Device=LM4041C12IDBZR, Manufacturer Part=LM4041C12IDBZR, Name=LM4041C12IDBZR, Noise - 1/10Hz to 10Hz=-, Noise - 10Hz to 10kHz=20uVrms, Output Type=固?, Output Voltage=1.225V, Reference Type=并?, Supplier=LCSC, Supplier Footprint=SOT-23, Supplier Part=C133587, Supply Current=-, Symbol=LM4041C12IDBZR
U5: JLCPCB Part Class="Basic Part", LCSC Part Name="ARM Cortex-M3 72MHz MSL=3", Low-Voltage Detect=-, Manufacturer=ST(Òâ·¨°, Operating Temperature Range=-40℃~+85?, Operating Voltage Range=2V~3.6V, ADC (Bit)=12bit, Add into BOM=yes, CCP Capture/Compare=-, communication protocol=-, Convert to PCB=yes, CPU Core="ARM Cortex-M3", CPU Maximum Speed=72MHz, DAC (Bit)=-, Datasheet=https://atta.szlcsc.com/upload/public/pdf/source/20220812/8363ACEC51AD55ECEB84799464F7CB85.pdf, Device=STM32F103C8T6, Direct Memory Access=-, EEPROM=64KB, GPIO Ports Number=37, Infrared Data Association=-, Internal Comparator=-, Internal Oscillator=有, Manufacturer Part=STM32F103C8T6, Name=STM32F103C8T6, Peripheral/Function=看门狗；DMA；, Program Memory Type=FLASH, Program Storage Size=64KB, PWM (Bit)=-, RAM Size=20KB, Real-Time Clock=-, Secure Digital Input and Output=-, Supplier=LCSC, Supplier Footprint=LQFP-48(7x7), Supplier Part=C8734, Symbol=STM32F103C8T6, Universal Serial Bus=-, Watchdog=-
U6: "CANоƬ", BOM_JLCPCB Part Class="Extended Part", BOM_Manufacturer=NXP, BOM_Manufacturer Part=TJA1051T/3/1J, BOM_Supplier=LCSC, BOM_Supplier Part=C38695, spicePre=U, spiceSymbolName=TJA1051T/3/1J
U7: "DCDC ADJ 3A", Input Voltage=-, JLCPCB Part Class="Extended Part", LCSC Part Name=½µÑ, Manufacturer=矽力杰sil, Add into BOM=yes, Convert to PCB=yes, Datasheet=https://atta.szlcsc.com/upload/public/pdf/source/20170308/1488958431714.pdf, Device=SY8303AIC, Function=½µÑ, Manufacturer Part=SY8303AIC, Name=SY8303AIC, Number of Outputs=-, Output Current (Max)=-, Supplier=LCSC, Supplier Footprint=TSOT-23-8, Supplier Part=C97054, Switching Frequency=-, Symbol=SY8303AIC, Synchronous Rectification=-, Topology=-
U8: BOM_JLCPCB SMD=Yes, BOM_Manufacturer=TI, BOM_Manufacturer Part=LP5907QMFX-3.3Q1, BOM_Supplier=LCSC, BOM_Supplier Part=C130005, Contributor=LCSC, SMT Type=Extend, spicePre=U, spiceSymbolName=LP5907QMFX-3.3Q1
U9: "内建可编程增益放大器的多通道24-bit的Delta Sigma A/D转换器", JLCPCB Part Class="Extended Part", LCSC Part Name="TM7705  խ?", Manufacturer=TM(ÌìÎ, Manufacturer Part=TM7705, Add into BOM=yes, Convert to PCB=yes, Datasheet=https://atta.szlcsc.com/upload/public/pdf/source/20160706/1467801115498.pdf, Device=TM7705_C77545, Name=TM7705, Supplier=LCSC, Supplier Footprint=SOIC-16, Supplier Part=C77545, Symbol=TM7705_C77545
USART1: library part "GH1.25 4p", "连接端子", BOM_Manufacturer="Changjiang Connectors", BOM_Manufacturer Part=A1257WR-S-4P, BOM_Supplier=LCSC, BOM_Supplier Part=C225127, Contributor=LCSC, spicePre=C, spiceSymbolName=A1257WR-S-4P
X1: "有源晶振12M", BOM_Manufacturer="Yangxing Tech", BOM_Manufacturer Part=OP322512MEDA4SI-u, BOM_Supplier=LCSC, BOM_Supplier Part=C382483, Contributor=LCSC, nameAlias=Frequency, spicePre=X, spiceSymbolName=OP322512MEDA4SI-U
X2: Frequency Stability=±10ppm, JLCPCB Part Class="Extended Part", LCSC Part Name="8MHz ±10ppm 1.8V~3.3V", Manufacturer=YXC(扬兴, Operating Temperature=-40℃~+85?, Supply Voltage=1.8V~3.3V, Add into BOM=yes, Convert to PCB=yes, Datasheet=https://atta.szlcsc.com/upload/public/pdf/source/20210329/C669065_30B18CFE780D377BA4E84F6ED1951959.pdf, Device=OT32258MJBA4SL, Manufacturer Part=OT32258MJBA4SL, Name=8MHz, Supplier=LCSC, Supplier Footprint=SMD3225-4P, Supplier Part=C717687, Symbol=OT32258MJBA4SL

## Via types
v1: diameter 24, hole 12, Top Layer to Bottom Layer, tented both sides, 277 vias
v2: diameter 34, hole 22, Top Layer to Bottom Layer, tented both sides, 32 vias
v3: diameter 50/50/50 (per signal layer), hole 28, Top Layer to Bottom Layer, tented both sides, 11 vias

## Nets (pads, with @x,y where several pads share a name; then routed paths per layer and width w, separated by ;. In a path a pad name is that pad's centre, name@x,y a point inside that pad or via, vN(x,y) a via of type N, cw(c..) or ccw(c..) an arc to the next point about the centre after c; other vN are vias at no path point)
3V3: 3V3.1 *1.3 *2.3 *3.3 C10.1 C12.2 C24.2 C26.2 C27.2 C47.2 C48.2 C49.2 L1.2 L3.2 L4.1 R22.1 R61.1 R62.1 R71.2 U5.24 U5.36 U5.48 | length 7178.2
  Top Layer w8: v1(1574.41,299.41) 1574.41,269.41 1530,225 1530,-38.07 3V3.1@1580,-88.07
  Top Layer w10: R71.2@2162.5,1088.77 2164,1088.77 2190,1114.77 v1(2190,1115) ; v1(2330,1005) 2353.1,1005 ; C10.1@2353.1,911.9 2353.1,1005 ; C24.2@2360,1395 2375,1380 2375,1378.79 2426.9,1326.88 ; U5.48@2384.42,1026.96 2360.37,1026.96 2353.1,1019.69 2353.1,1005 ; v1(2411.88,1326.88) 2426.9,1326.88 ; U5.36@2443.47,1302.55 2443.47,1326.59 2443.17,1326.88 2426.9,1326.88 ; L1.2@2578.17,433.75 C12.2@2645,433.75 ; v1(2645,400) C12.2@2645,433.75 ; C12.2@2645,434.41 C12.2@2645,433.75 ; U5.24@2719.06,1243.5 v1@2719.06,1305.24 ; v1(2719.06,1314.06) v1@2719.06,1305.24 ; R22.1@2745.6,820.6 2754.4,820.6 2754.95,821.16 2763.84,821.16 v1(2780,805) ; C27.2@2771.91,1358.1 v1@2719.06,1305.24
  Top Layer w20: v1(1410,685) 1465,685 L4.1@1510,730
  POWER w10: v1(2190,1115) 2300,1005 v1(2330,1005) ; v1(2645,400) 2645,571.82 2780,706.82 v1(2780,805)
  POWER w15: v1(1410,685) 1250,845 1250,1025 1310,1085 1440,1085 1490,1135 1580,1135 v1(1600,1155) 1625,1180 1625,1420 v1(1718.09,1513.09)
  POWER w20: v1(1570,825) 1569.23,824.23 1549.23,824.23 v1(1410,685) 1490,605 1490,494.95 1574.41,410.54 ; v1(1574.41,299.41) 1574.41,410.54 ; 2300,1005 2250,955 2160,955 1810,605 1810,515 1740,445 1608.87,445 1574.41,410.54
  Bottom Layer w10: *1.3@1460,1219.41 1505.71,1219.41 C47.2@1525.71,1199.41 1555.59,1199.41 v1(1600,1155) ; *2.3@1464.29,889.41 ccw(c1484.29,889.41) 1484.29,869.41 C48.2@1530,869.41
  Bottom Layer w15: C49.2@1650,1490.59 1687.5,1490.59 ; *3.3@1715.71,1470.59 1705.87,1470.59 1705.49,1470.96 1705.49,1472.59 1687.5,1490.59 ; v1(1718.09,1513.09) 1710,1513.09 1687.5,1490.59
  Bottom Layer w20: C48.2@1530,869.41 1530,865 v1(1570,825) ; v1(1574.41,299.41) C26.2@1860,299.41 1862.21,297.21 1932.79,297.21 L3.2@1935,295 ; v1(2780,805) 2750,775 2391.72,775 2350,816.72 2350,985 v1(2330,1005) 2330,1006.08 2307.5,1028.58 2307.5,1036.39 2280,1063.89 2280,1275 2331.88,1326.88 v1(2411.88,1326.88) 2443.77,1295 2571.34,1295 2590.4,1314.06 v1(2719.06,1314.06) 2720.14,1314.06 2751.08,1345 R61.1@2845.5,1345 R62.1@2845.5,1265
12V: 12V.1 C2.2 C4.2 C5.2 R1.1 U1.2 U2.4 U3.1 | length 2426.4
  Top Layer w8: 12V.1@1380,-88.08 v1(1380,-45)
  Top Layer w10: U3.1@1639.04,189.42 1648.88,189.42 1664.41,204.95 C5.2@1664.41,265 C4.2@1664.41,325 ; U1.2@2569.36,-147.6 U1.2@2578.62,-147.6 2638.19,-147.6 C2.2@2650,-159.41 2711.09,-159.41 R1.1@2720,-150.5
  Top Layer w20: v1(2230,315) 2230,135 2250,115 2450,115 2490,75 2490,-68.23 U1.2@2569.36,-147.6
  Top Layer w40: C4.2@1664.41,325 1668.09,328.68 1668.09,363.09 v3(1670,365)
  POWER w8: v1(1380,-45) 1610,-45 1820,165 1820,225
  POWER w40: v3@1664.41,359.41 v3(1670,365) 1810,225 ; 1820,225 2140,225 v1(2230,315)
  Bottom Layer w10: U2.4@2230,245.56 v1(2230,315)
24V_IN: *.3 BUZZER1.1 C20.1 C21.1 C22.1 C23.1 C45.1 CN1.2 CN2.2 CN3.2 CN4.2 D13.2 R19.2 U7.5 | length 4140
  Top Layer w15: *.3@730,-135 739.5,-125.5 R19.2@739.5,15
  Top Layer w40: CN4.2@100,1663.74 103.83,1667.57 103.83,1718.83 180,1795 360,1795 394.9,1760.1 394.9,1717.5 C45.1@397.4,1715 481.65,1715 BUZZER1.1@541.65,1775 ; BUZZER1.1@550,1775 747.86,1972.86 D13.2@934.19,1972.86
  Top Layer w50: C23.1@605,-127.91 625,-127.91 632.09,-135 *.3@730,-135 C21.1@830,-135
  POWER w80: 10,845 10,842.68 CN1.2@100,842.68 ; 10,1125 10,1116.36 CN2.2@100,1116.36 ; 10,1385 10,1390.05 CN3.2@100,1390.05 ; 30,1663.74 CN4.2@100,1663.74
  POWER w90: 10,842.68 10,465 210,265 210,-35 310,-135 *.3@730,-135 ; 10,845 10,1116.36 ; 10,1125 10,1385 ; 10,1390.05 10,1663.74
24V_SW: U2.1 U3.6 | length 402.9
  Top Layer w10: U3.6@1752.15,182.61 U3.6@1745.34,189.42 1785.58,189.42 v1(1786.69,188.32)
  Bottom Layer w10: v1(1786.69,188.32) 1833.37,235 2058.26,235 2078.26,215 2080,215 U2.1@2080,245.56
24V_SW_OUT: 24.1 *.10 R6.1 R7.1 | length 879.8
  Top Layer w8: 24.1@1280,-88.07 1463.07,95 R7.1@1495.5,95
  Top Layer w10: *.10@1225,505 *.10@1232.61,497.39
  Top Layer w20: *.10@1225,505 1320,505 1495.5,329.5 R7.1@1495.5,95
48V: 48V.1 *.1 C3.1 D2.1 R48.2 U1.3 | length 2302.5
  Top Layer w10: 48V.1@1180,-88.07 v1(1180,-55)
  Top Layer w20: *.1@2230,-135 2372.91,-135 C3.1@2380,-127.91 ; D2.1@2397.06,5 2397.06,-110.85 C3.1@2380,-127.91 ; U1.3@2481.37,-185 2479.56,-183.19 2455.28,-183.19 2400,-127.91 C3.1@2380,-127.91
  POWER w10: v1(1180,-55) 1190,-55 1270,-135 *.1@2230,-135
  Bottom Layer w10: *.1@2230,-135 2730,-135 2800,-65 2800,18 2740,78 R48.2@2740,79.5
A+: *.6 R13.2 | length 190.2
  Bottom Layer w10: *.6@1020,1035 1108.58,1035 ccw(c1108.58,1135) 1179.29,1064.29 R13.2@1195.6,1080.6
A-: *.5 R12.2 | length 245.4
  Bottom Layer w10: *.5@920,1035 996.32,1111.32 cw(c1067.03,1040.61) 1052.5,1139.54 1124.54,1139.54 R12.2@1125.61,1140.61
AGND: *1.2 *2.2 *3.2 C6.2 C7.2 C8.2 C31.2 C32.2 C33.2 C40.1 C47.1 C48.1 C49.1 R34.1 R35B.2 U4.2 U9.16 | length 2889.4
  Top Layer w20: v1(1570,905) 1670,805 v1(1670,735) ; v1(1574.41,1289.41) 1581.32,1282.5 1611.39,1282.5 1628.89,1265 v1(1680,1265)
  POWER w20: v1(1310,1015) 1350,1015 1460,905 v1(1570,905) 1680,1015 v1(1680,1265) ; v1(1560,555) 1590,585 1650,585 1670,605 v1(1670,735)
  Bottom Layer w10: U4.2@1442.6,726.38 1442.6,842.4 1420,865 1420,895 1437.13,912.13 1461.42,912.13 *2.2@1464.29,915 cw(c1469.89,915) 1469.89,920.59 C48.1@1530,920.59 1540,910.59 1564.41,910.59 v1(1570,905) ; *1.2@1460,1245 1520.12,1245 C47.1@1525.71,1250.59 ; C49.1@1650,1439.41 1655.59,1445 *3.2@1715.71,1445 ; v1(1670,735) C40.1@1704.41,735 1680,759.41 U9.16@1680,815
  Bottom Layer w20: v1(1310,1015) 1310.77,1015.77 1310.77,1045.77 1340,1075 C7.2@1404.41,1075 ; C6.2@1505.59,1415 1510.59,1410 1595,1410 1604.41,1400.59 1604.41,1393.82 ; C47.1@1520.12,1245 1530,1245 v1(1574.41,1289.41) ; C49.1@1650,1439.41 1604.41,1393.82 ; v1(1680,1265) 1680,1268.67 1625.09,1323.58 1625.09,1324.32 C8.2@1604.41,1345 1604.41,1393.82 ; R35B.2@1697.75,590.5 1694.75,587.5 1593.58,587.5 1561.08,555 v1(1560,555) 1550,545 1550,446.13 1561.72,434.41 1585,434.41 C31.2@1590,429.41 C33.2@1715.87,429.41
AVDD: C31.1 C32.1 C33.1 C40.2 L5.2 U9.13 U9.14 | length 975
  POWER w20: v3@1652,535 1805,688 v1(1805,875)
  Bottom Layer w10: C40.2@1755.59,735 1780,759.42 U9.14@1780,815 1780,865 1790,875 v1(1805,875) 1820,875 1830,865 U9.13@1830,815
  Bottom Layer w20: C31.1@1590,480.59 1650,480.59 v3@1650,534.06 ; 1622.94,480.3 C32.1@1652.94,480.3 ; 1684.69,480.59 C32.1@1654.69,480.59 1652.94,480.59 C32.1@1652.94,480.3 ; C33.1@1715.57,480.3 C32.1@1652.94,480.3 ; C33.1@1715.87,480.59 1720.87,475.59 1734.41,475.59 L5.2@1780,430
  other v3: 1650,535
B+: *.8 R73.2 | length 427.6
  Bottom Layer w10: *.8@1025,505 1025,745 cw(c1125,745) 1125,845 R73.2@1155.5,845
B-: *.7 R14.2 | length 637.6
  Bottom Layer w10: *.7@925,505 925,855 cw(c1025,855) 1025,955 R14.2@1155.5,955
B_A: CN2.4 Q6.3 | length 316.4
  Top Layer w40: CN2.4@103.83,1034.51 103.83,984.51 169.62,918.71 343,918.71
B_B: CN1.4 Q7.3 | length 316.4
  Top Layer w40: CN1.4@103.83,761.17 103.83,711.17 169.62,645.38 343,645.38
B_C: CN3.4 Q12.3 | length 316.4
  Top Layer w40: CN3.4@103.83,1307.84 103.83,1257.84 169.62,1192.04 343,1192.04
B_D: CN4.4 Q13.3 | length 322.8
  Top Layer w40: CN4.4@100,1585 103.83,1581.17 103.83,1531.17 169.62,1465.38 Q13.3@344,1465.38
BEEP: R50.18 R_BEEP.1 | length 1200.4
  Top Layer w10: R_BEEP.1@890,1520.59 890,1645 961.81,1716.81 v1@1510,1716.81 ; v1(1720,1645) 1810,1555 R50.18@1870,1555
  POWER w10: v1(1510,1715) 1650,1715 v1(1720,1645)
BLUE: Q14.1 R50.16 | length 1811.8
  Top Layer w10: Q14.1@1037.4,160 v1(1037.4,202.4) ; v1(1360,585) 1360,595 1410,645 v1(1560,645) ; v1(1720,1225) 1720,1338.46 1836.54,1455 R50.16@1870,1455
  POWER w10: v1(1037.4,202.4) 1145.04,310.04 1255.04,310.04 1360,415 v1(1360,585) ; v1(1560,645) 1560,745 1720,905 v1(1720,1225)
BOOT0: R69.2 SW3.4 U5.44 | length 2073.7
  Top Layer w8: SW3.4@1970,-225 1970,-200.59 1970,-120.39 2044.9,-45.49 2044.9,189.9 2220,365 v1(2250,365) ; v1(2180,405) 2210.2,405 2296,490.8 2296,681 2446,831 2446,898.59 2429.59,915 2410,915 2374,879 2347.01,879 2270.51,955.51 2270.51,1015.51 2340,1085 2340,1095 2350.2,1105.2 2383.91,1105.2 U5.44@2384.42,1105.7
  Top Layer w10: SW3.4@1970,-200.59 1990.59,-180 2029.42,-180 R69.2@2120,-89.41
  POWER w8: v1(2180,405) 2220,365 v1(2250,365)
BOOT1: SW3.3 U5.20 | length 1787.9
  Top Layer w10: SW3.3@1870,-225 1870,-200.59 2030,-40.59 2030,205 2310,485 2310,675 2460,825 v1(2460,915) ; v1(2550,1075) 2639.76,1164.76 U5.20@2719.06,1164.76
  Bottom Layer w10: v1(2460,915) 2460,985 v1(2550,1075)
C+: *.11 R75.2 | length 137.8
  Bottom Layer w10: R75.2@1940,1549.5 1940,1551 2030,1641 *.11@2030,1650
C-: *.9 R74.2 | length 152.5
  Bottom Layer w10: R74.2@2020,1549.5 2020,1551 2032.5,1563.5 2043.5,1563.5 *.9@2130,1650
CAN1_H: CN6.1 D4.2 R23.2 U6.7 | length 617.3
  Top Layer w10: CN6.1@1245.4,1832.01 1245.4,1769.6 1280,1735 1350,1735 1485.5,1870.5 R23.2@1560,1870.5 ; D4.2@1573.46,1805 1573.46,1855.54 1560,1869 R23.2@1560,1870.5 ; U6.7@1656.13,1876.93 1566.43,1876.93 R23.2@1560,1870.5
CAN1_L: CN6.2 D6.2 R23.1 U6.6 | length 591.4
  Top Layer w10: CN6.2@1294.6,1832.01 1294.6,1770.86 1300.46,1765 1340,1765 1514.5,1939.5 R23.1@1560,1939.5 ; R23.1@1547.5,1953.5 R23.1@1560,1941 ; D6.2@1573.46,2005 1573.46,1954.46 R23.1@1560,1941 ; U6.6@1656.13,1926.93 1572.5,1926.93 1560,1939.43 R23.1@1560,1939.5 ; R23.1@1560,1939.5 R23.1@1560,1941
G_A: CN2.1 Q4.3 | length 510.3
  Top Layer w40: CN2.1@201.26,1117.07 270,1048.33 493.22,1048.33 622.84,918.71 Q4.3@629.38,918.71
G_B: CN1.1 Q5.3 | length 503.7
  Top Layer w40: CN1.1@201.26,843.74 270,775 493.22,775 Q5.3@622.84,645.38
G_C: CN3.1 Q10.3 | length 510.3
  Top Layer w40: CN3.1@201.26,1390.41 270,1321.67 493.22,1321.67 622.84,1192.04 Q10.3@629.38,1192.04
G_D: CN4.1 Q11.3 | length 532.8
  Top Layer w40: CN4.1@178.74,1663.74 201.26,1663.74 270,1595 493.22,1595 622.84,1465.38 Q11.3@629.38,1465.38
GND: *.2 *.4 *.13 C1.1 C2.1 C3.2 C4.1 C5.1 C10.2 C11.1 C12.1 C13.2 C16.2 C17.1 C19.2 C20.2 C21.2 C22.2 C23.2 C24.1 C25.1 C26.1 C27.1 C28.2 C29.2 C30.2 C34.2 C35.2 C36.2 C37.2 C38.2 C39.1 C41.2 C42.2 C43.2 C44.2 C45.2 C50.2 CN6.3 CN6.4 D2.2 D4.1 D6.1 D9.1 JLINK1.3 JLINK1.5 JLINK1.6 Q2.2 Q3.2 Q4.2 Q5.2 Q6.2 Q7.2 Q8.2 Q9.2 Q10.2 Q11.2 Q12.2 Q13.2 Q15.2 R2.2 R4.1 R5.1 R11.1 R15.1 R18.1 R25.2 R26.1 R33.2 R34.2 R39.1 R39.10 R39.19 R50.1 R50.10 R50.19 R55.2 R56.2 R58.1 R66.1 R67.1 R68.1 R69.1 R70.2 RST1.2 SW1.2 SW2.2 U1.1 U2.11 U3.4 U3.5 U5.8 U5.23 U5.35 U5.47 U6.2 U6.8 U7.3 U7.4 U8.2 U9.11 USART1.2 USART1.5 USART1.6 X1.2 X2.2 | length 6319.1
  Top Layer w10: R15.1@454.5,-270 R25.2@454.5,-195 ; v1(990,1685) 990,1661.29 996.29,1655 R39.1@1011.74,1655 ; R39.10@1011.74,1205 v1(1080,1205) ; CN6.3@1168.62,1957.99 1170,1956.61 v3(1170,1865) ; R39.19@1370,1605 1407.15,1605 1419.5,1617.35 1432.35,1617.35 v3(1440,1625) 1444.59,1625 1474.59,1655 R50.1@1511.74,1655 v1(1570,1655) ; v1(1470,1805) D4.1@1506.54,1805 ; R50.10@1511.74,1205 v1(1590,1205) ; U6.8@1656.13,1826.93 1658.06,1825 v1(1700,1825) ; v1(1730,375) 1730,339.41 C4.1@1715.59,325 C5.1@1715.59,265 1715.59,250.59 1700,235 1700,175 1716.17,158.83 1738.53,158.83 U3.5@1745.34,152.02 U3.4@1745.34,114.62 ; v1(1791.93,1876.93) U6.2@1852.98,1876.93 1947.52,1876.93 C17.1@1950,1879.41 ; R50.19@1870,1605 1930,1605 v1(1940,1615) ; R4.1@2090,106 2090,104.5 2228.5,-34 v1(2230,-34) ; v1(2120,-195) R69.1@2120,-140.59 ; C10.2@2316.91,948.1 2290,975 2290,1003.18 2333.47,1046.65 U5.47@2384.42,1046.65 2451.65,1046.65 v1(2480,1075) 2540.57,1014.43 2570.57,1014.43 2581.14,1003.86 2581.14,968.03 U5.8@2581.27,967.91 2581.39,967.79 2581.39,923.61 2600,905 2653.81,905 C19.2@2691.9,866.91 ; C24.1@2360,1446.18 2390,1416.18 2390,1385 2430,1345 2447.59,1345 2463.16,1329.44 U5.35@2463.16,1302.55 2463.16,1275.65 2530,1208.81 v1(2530,1155) ; v1(2462.5,545) 2440,545 cw(c2440,590) 2395,590 v1(2395,647.23) 2395,659.82 ; v1(2485,730) 2480,725 v1(2440,725) 2420,725 ccw(c2420,700) 2395,700 2395,659.82 ; v1(2540,250) 2565.4,250 2590.4,225 ccw(c2690.4,225) 2690.4,125 C44.2@2724.41,125 ; v1(2550,730) v1(2600,730) cw(c2600,690) 2640,690 v1(2640,665) 2640,640 ; X1.2@2576.93,680.09 2576.93,641.93 cw(c2575,641.93) 2575,640 ; v1(2600,550) ccw(c2600,590) 2638.81,580.3 ; C12.1@2645,485.59 2645,574.11 ccw(c2638.81,574.11) 2638.81,580.3 ; U5.23@2719.06,1223.81 2768.81,1223.81 2808.1,1263.1 C27.1@2808.1,1321.9 2786.9,1321.9 v1(2750,1285) ; SW2.2@2793.37,440.56 v1(2869.44,440.56) ; USART1.2@2857.01,1589.59 v1(2960,1589.59) ; 2395,659.82 cw(c2399.52,659.82) 2399.52,664.34 C11.1@2433.17,664.34 ccw(c2457.51,664.34) 2457.51,640 2575,640 ; 2575,640 2640,640 ; 2638.81,580.3 ccw(c2600,590) 2640,590 v1(2640,615) 2640,640
  Top Layer w20: R66.1@1034.5,265 1040,270.5 1041.5,270.5 1076,305 1174.5,305 ; R67.1@1174.5,265 1174.5,305 ; v3(1174.5,380.5) 1174.5,305 ; R68.1@1314.5,265 1313,265 1273,305 1174.5,305 ; R34.2@1694.4,909.4 1730,945 v1(1810,945)
  POWER w10: v1@2545,735 ccw(c2550,735) v1(2550,730)
  Bottom Layer w10: R26.1@1130,-90.5 R11.1@1229.75,-90.5 R5.1@1329.5,-90.5 ; R5.1@1330,-90 R5.1@1329.5,-90.5 ; v3(1680,-185) 1585.5,-90.5 R33.2@1530,-90.5 R55.2@1430.25,-90.5 R5.1@1329.5,-90.5 ; v1(1910,405) cw(c1910,465) 1850,465 v1(1850,495) ; U9.11@1930,815 1930,740.59 C41.2@1935.59,735 ; X2.2@1935.55,538.31 1952.2,521.66 1952.2,495 ; v1(1950,595) 1900,595 ccw(c1900,545) 1850,545 v1(1850,495) ; v1(2040,405) 2070,405 ccw(c2070,455) 2120,455 v1(2120,505) 2120,555 ccw(c2080,555) v1(2080,595) v1(2040,595) ; C25.1@2080,520.59 2054.41,495 1952.2,495 ; v1(2230,-34) U2.11@2230,27.52 ; v1(1850,495) 1952.2,495
  other v1: 495,-220 515,-205 390,-50 415,-50 0,0 25,0 0,25 25,25 0,50 25,50 2510,120 2590,300 2975,335 2100,415 1860,435 3025,435 2120,445 2420,550 1850,555 2120,565 367.23,585 392.23,585 505,585 530,585 642.77,585 667.77,585 2395,587.32 1890,595 392.23,610 530,610 667.77,610 1920,665 1355,685 2400,705 2635,710 975,725 1000,725 1070,725 1095,725 975,755 1000,755 1070,755 1095,755 1330,835 1350,850 367.23,858.33 392.23,858.33 505,858.33 530,858.33 642.77,858.33 667.77,858.33 392.23,883.33 530,883.33 667.77,883.33 1640,1120 2035,1125 2070,1125 367.23,1131.67 392.23,1131.67 505,1131.67 530,1131.67 642.77,1131.67 667.77,1131.67 392.23,1156.67 530,1156.67 667.77,1156.67 1850,1175 800,1335 830,1335 850,1360 850,1390 367.23,1405 392.23,1405 505,1405 530,1405 642.77,1405 667.77,1405 392.23,1430 530,1430 667.77,1430 249,1701 279,1701 249,1731 279,1731
GREEN: Q17.1 R50.12 | length 1441.1
  Top Layer w10: Q17.1@1317.4,160 v1(1317.4,202.4) ; v1(1420,525) 1490,595 1610,595 1620,605 v1(1620,615) ; v1(1780,1225) 1780,1245 1790,1255 R50.12@1870,1255
  POWER w10: v1(1317.4,202.4) 1317.4,302.4 1420,405 v1(1420,525) ; v1(1620,615) 1632.5,627.5 1632.5,757.5 1780,905 v1(1780,1225)